# Altium PCB ROLL.PcbDoc (part 1 of 2)
Units mil, origin at the board's own origin, x right, y up, seen from the top; angles counter-clockwise.
Board outline 2043.78 x 1898.01 mil, 6 copper layers (Top Layer, Layer 1, Layer 2, Layer 3, Layer 4, Bottom Layer), stack 32.112 mil thick; 69 components, 72 nets, 326 pads, 408 vias.
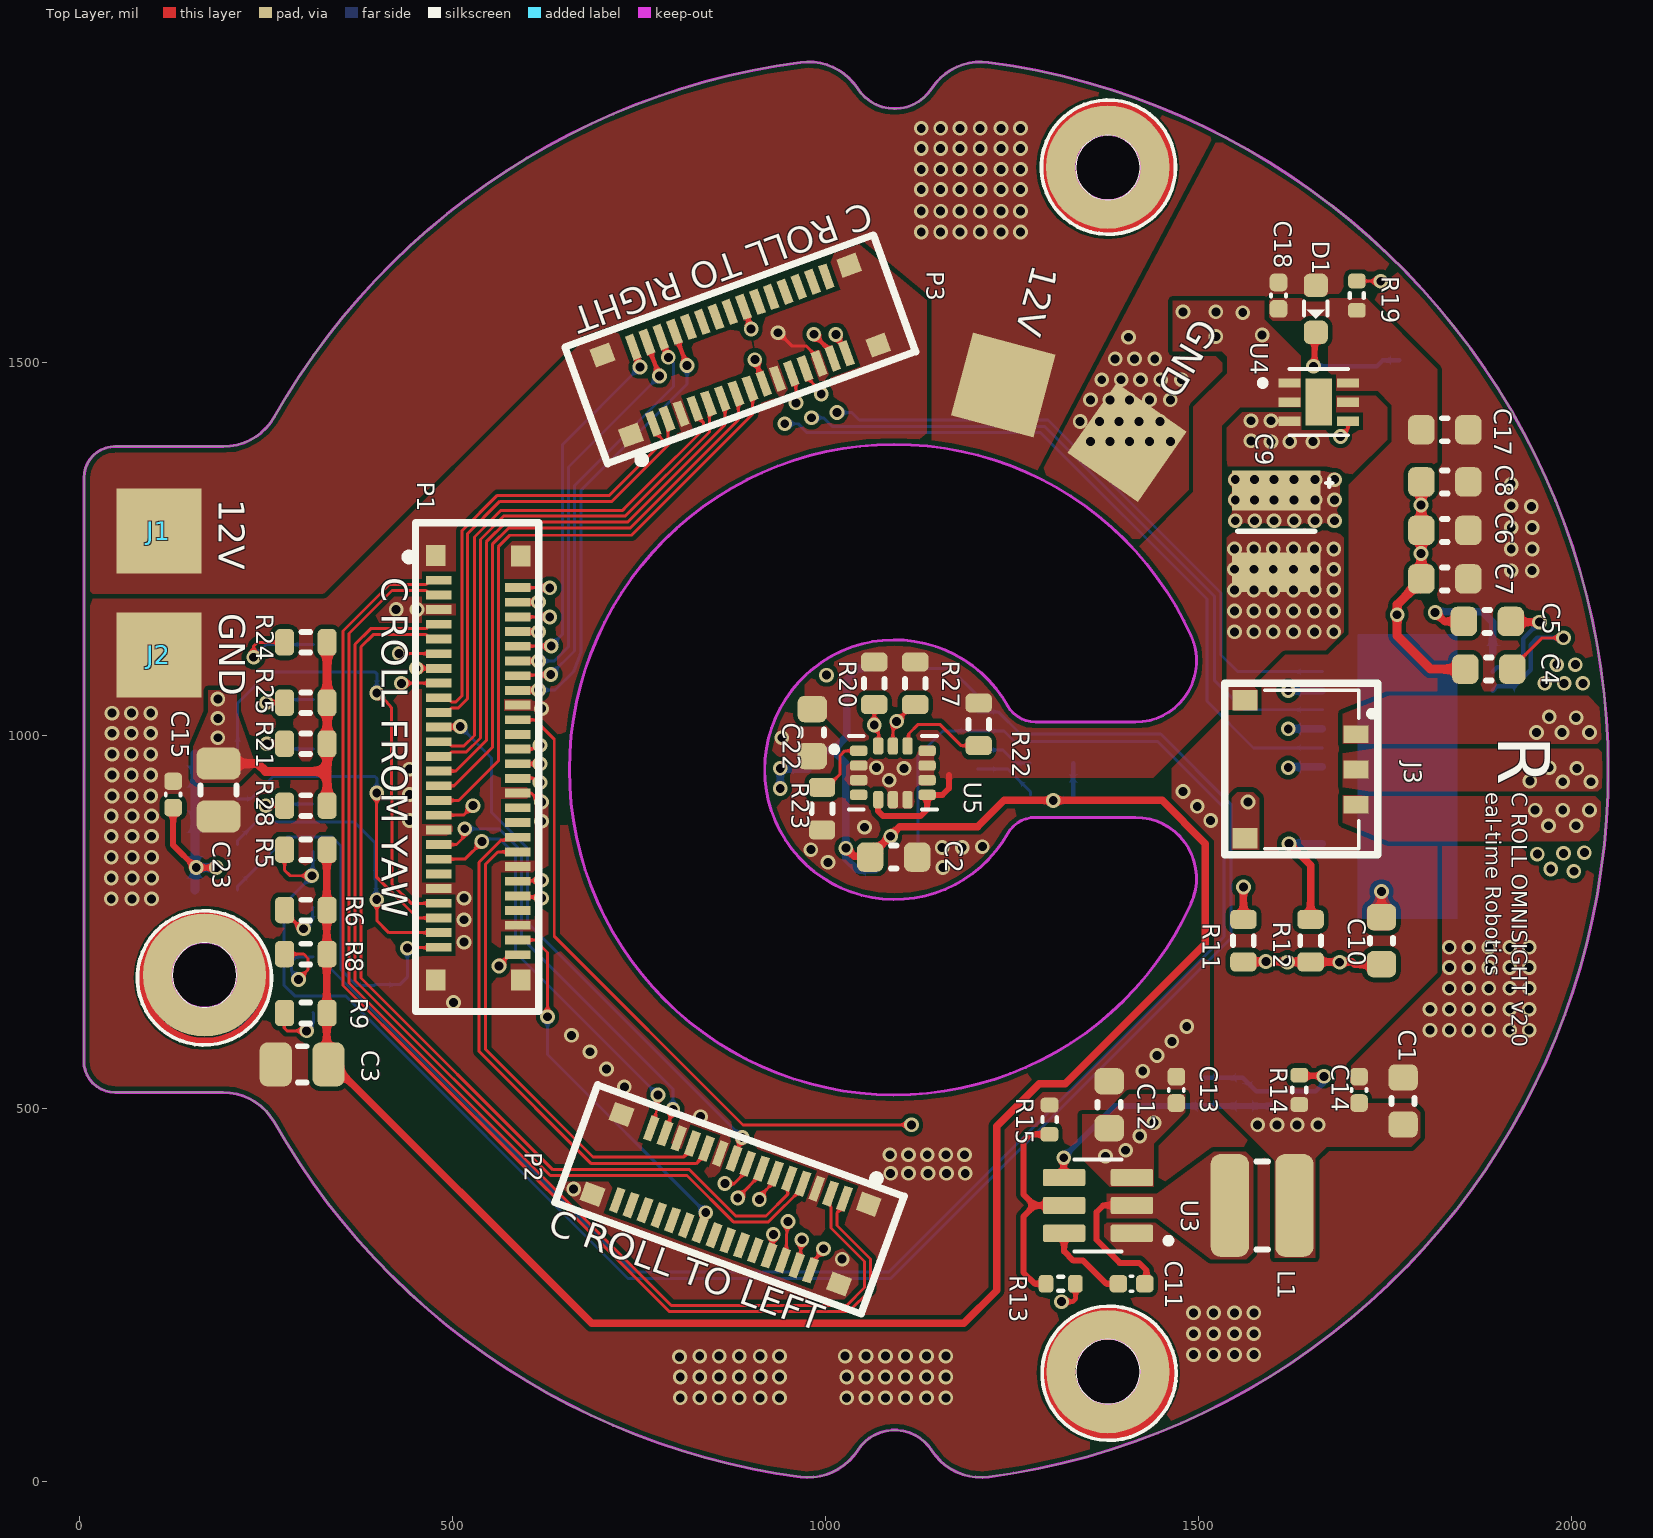
[diagram p0: Top Layer view]
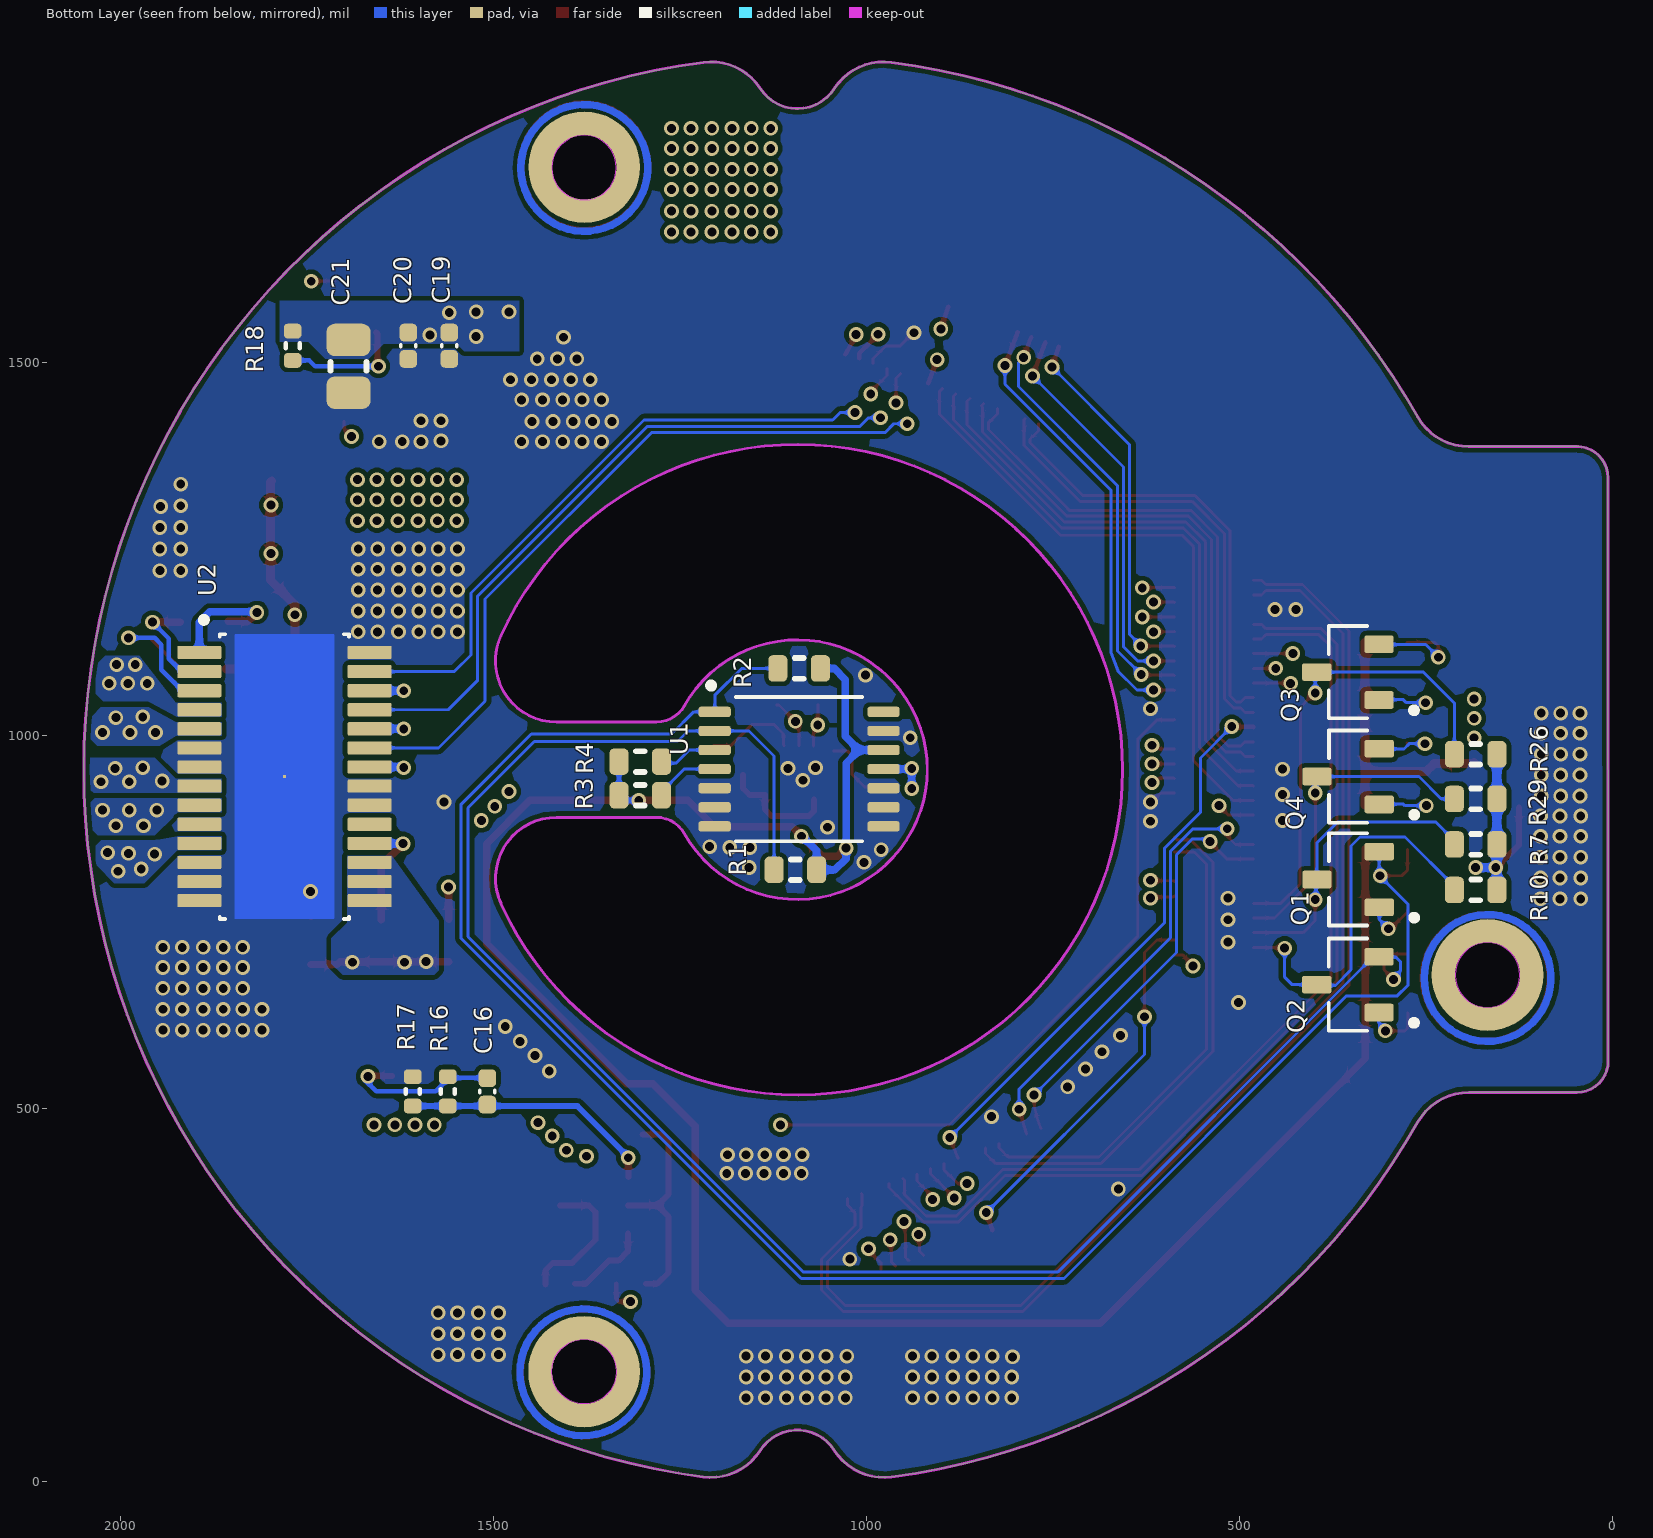
[diagram p1: Bottom Layer view, seen from below]
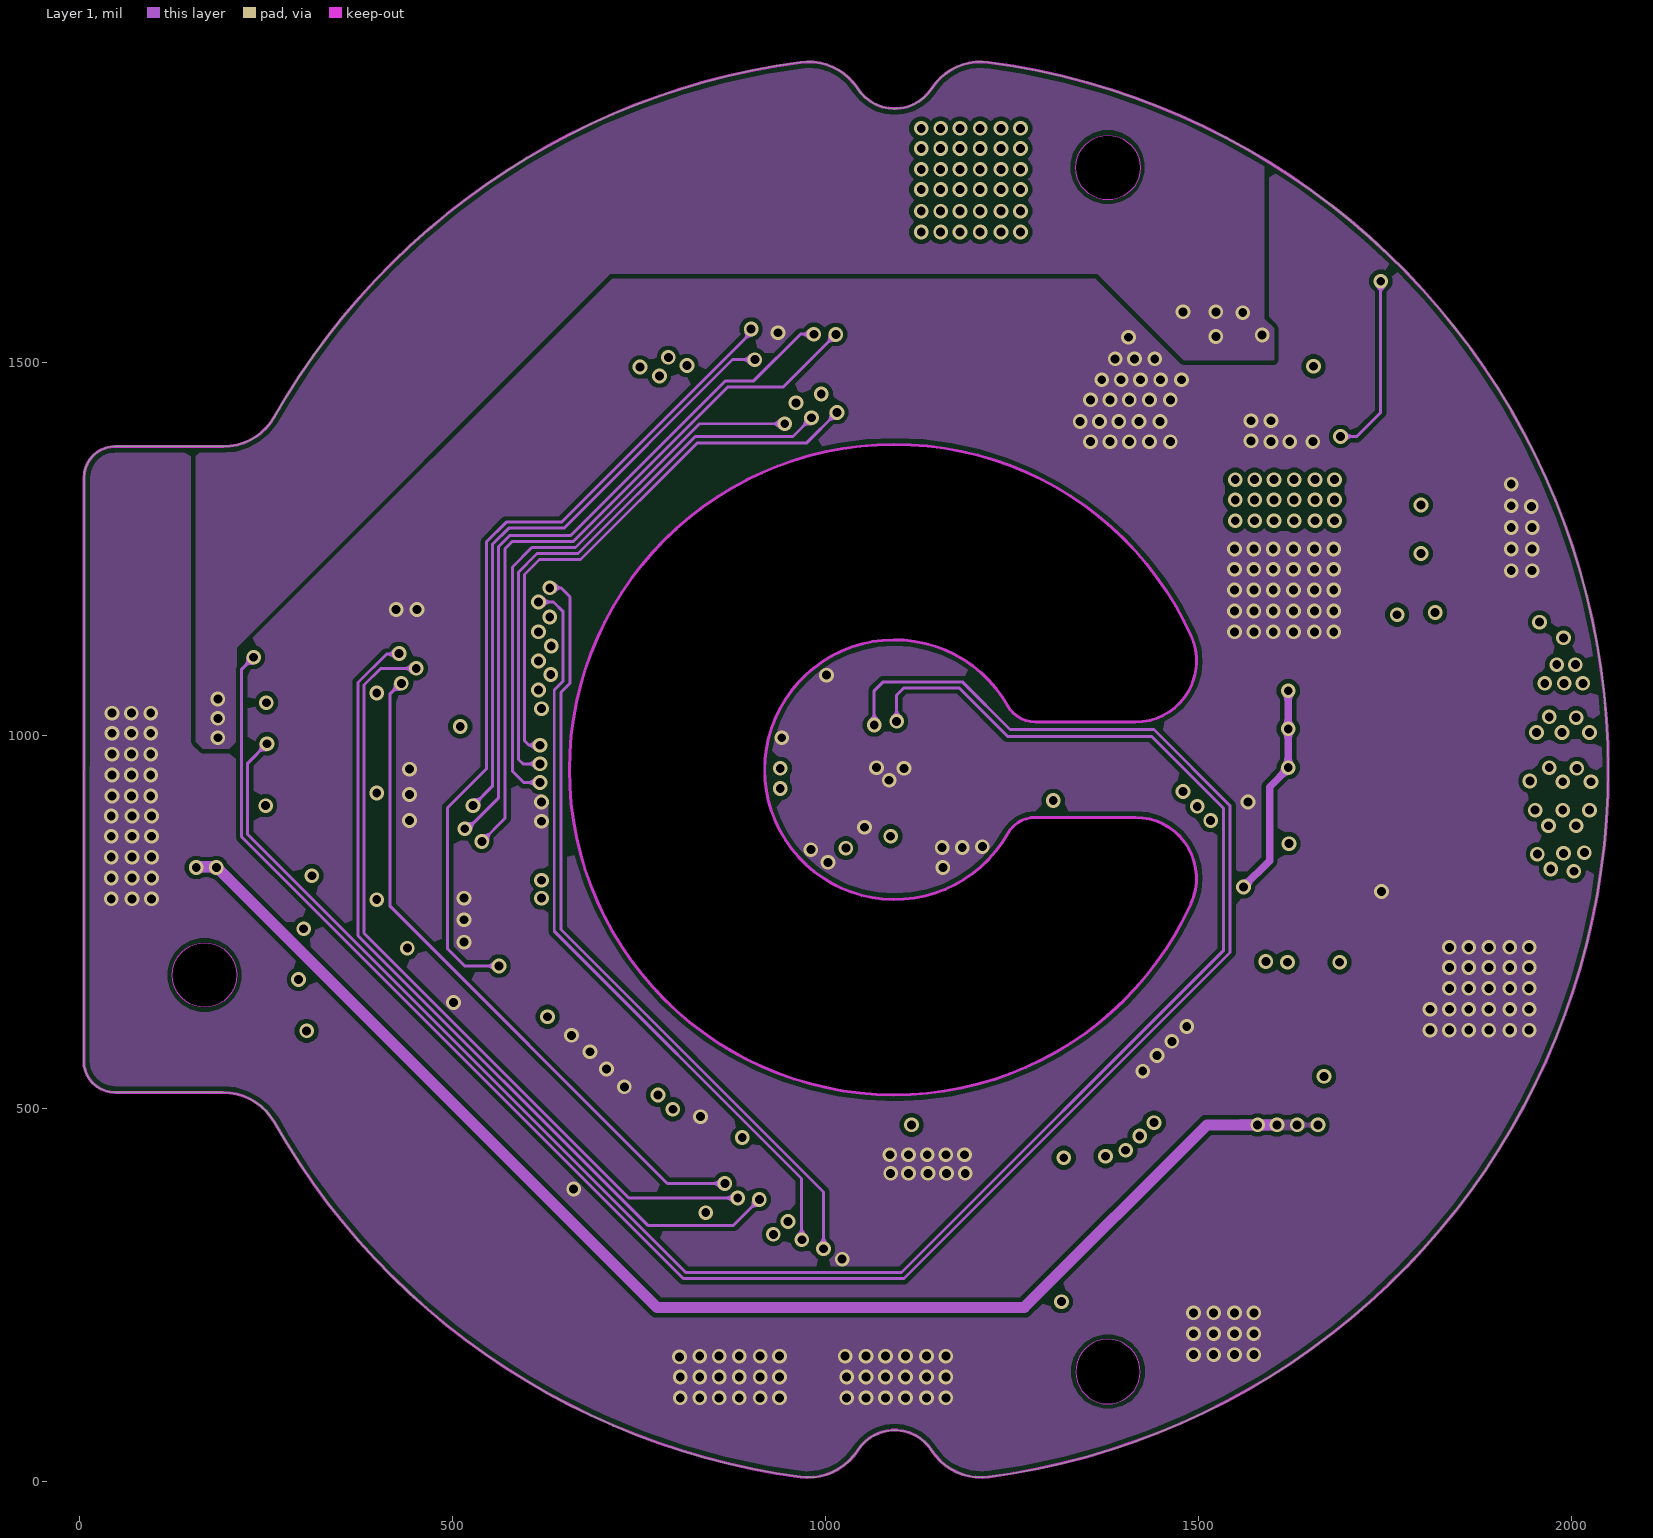
[diagram p2: Layer 1]
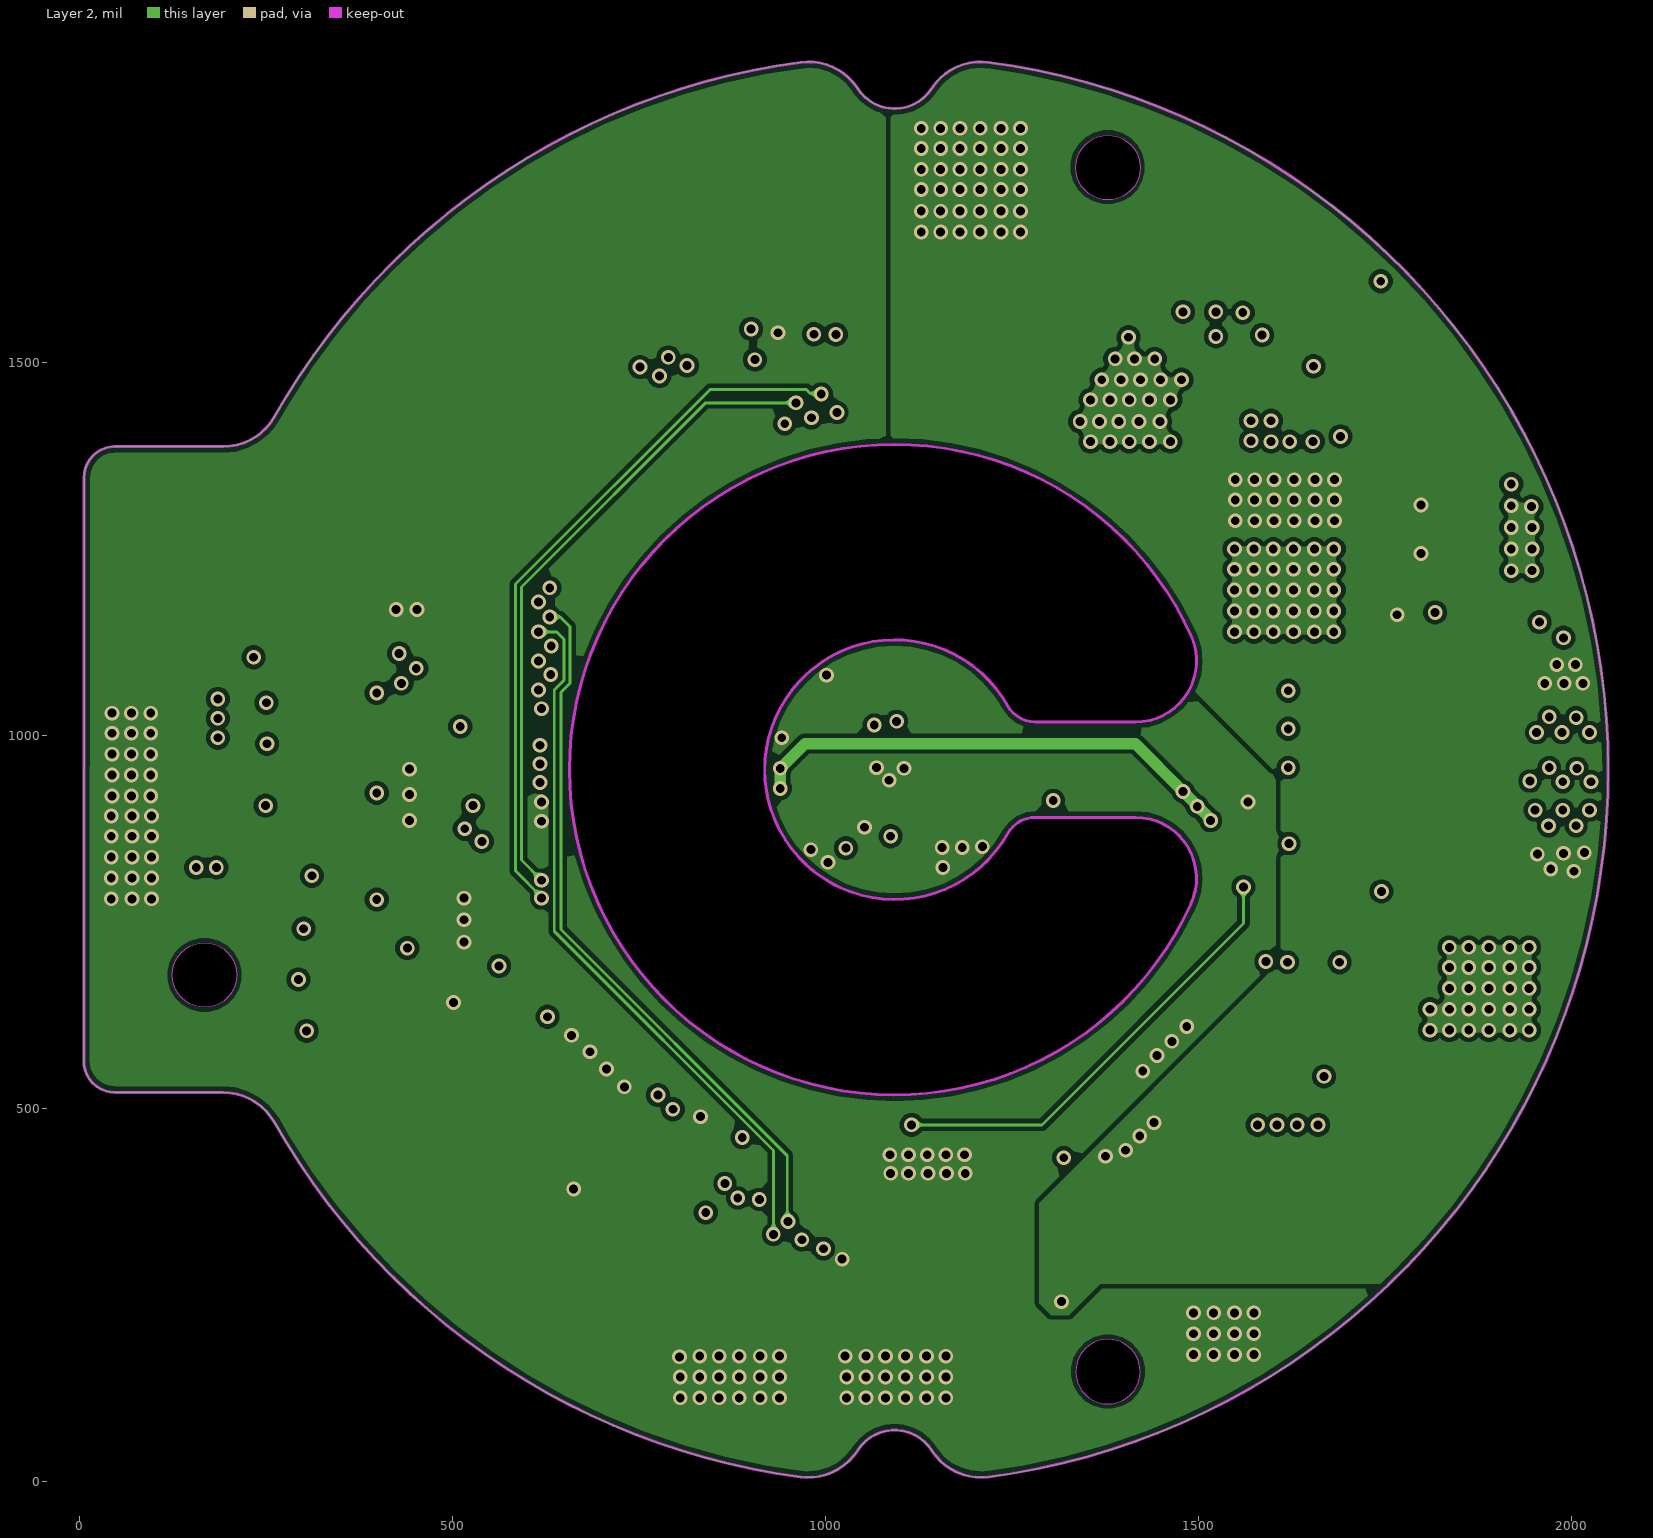
[diagram p3: Layer 2]
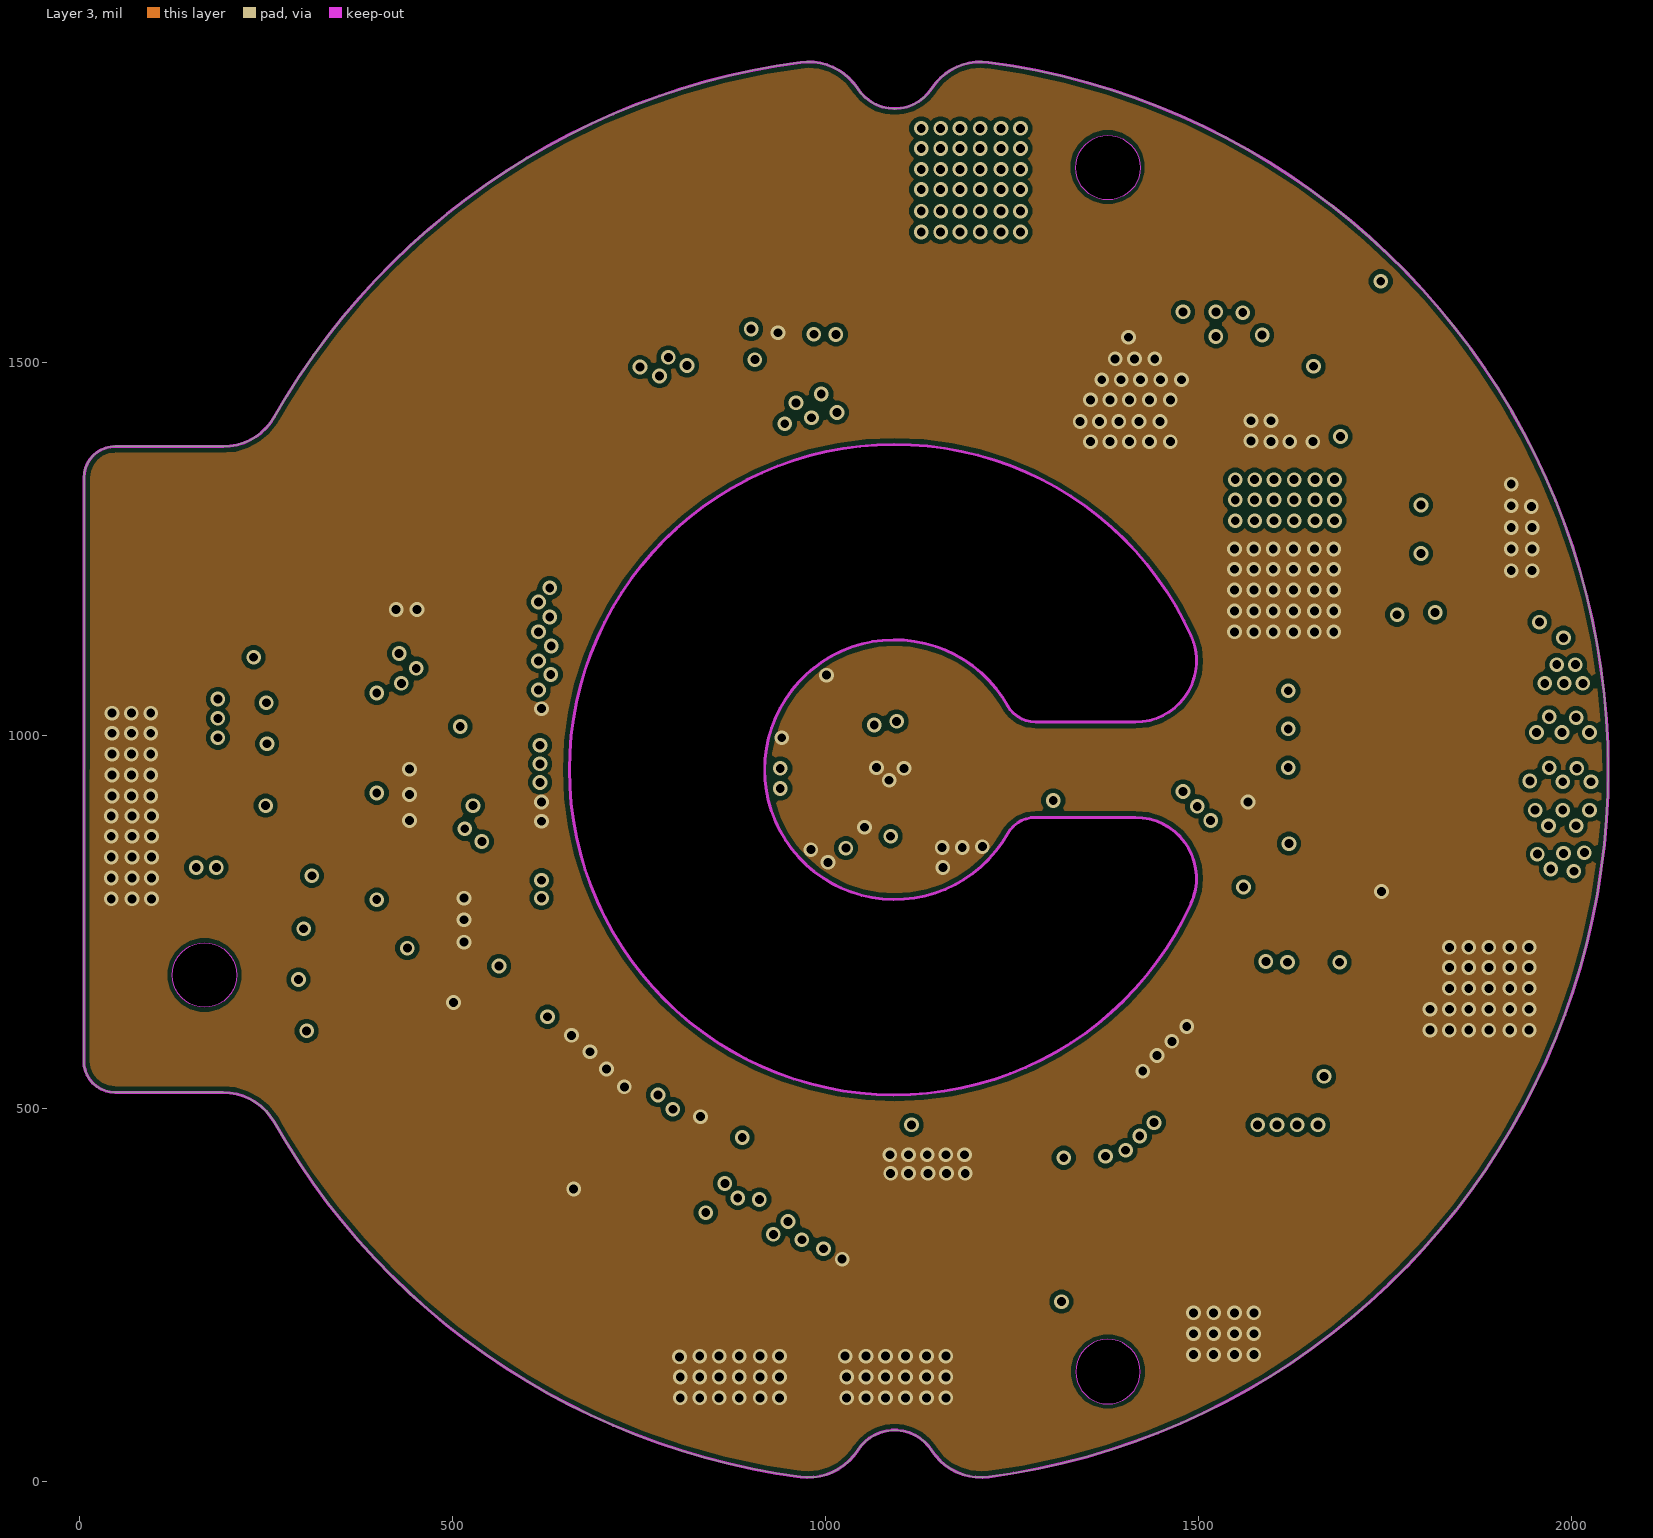
[diagram p4: Layer 3]
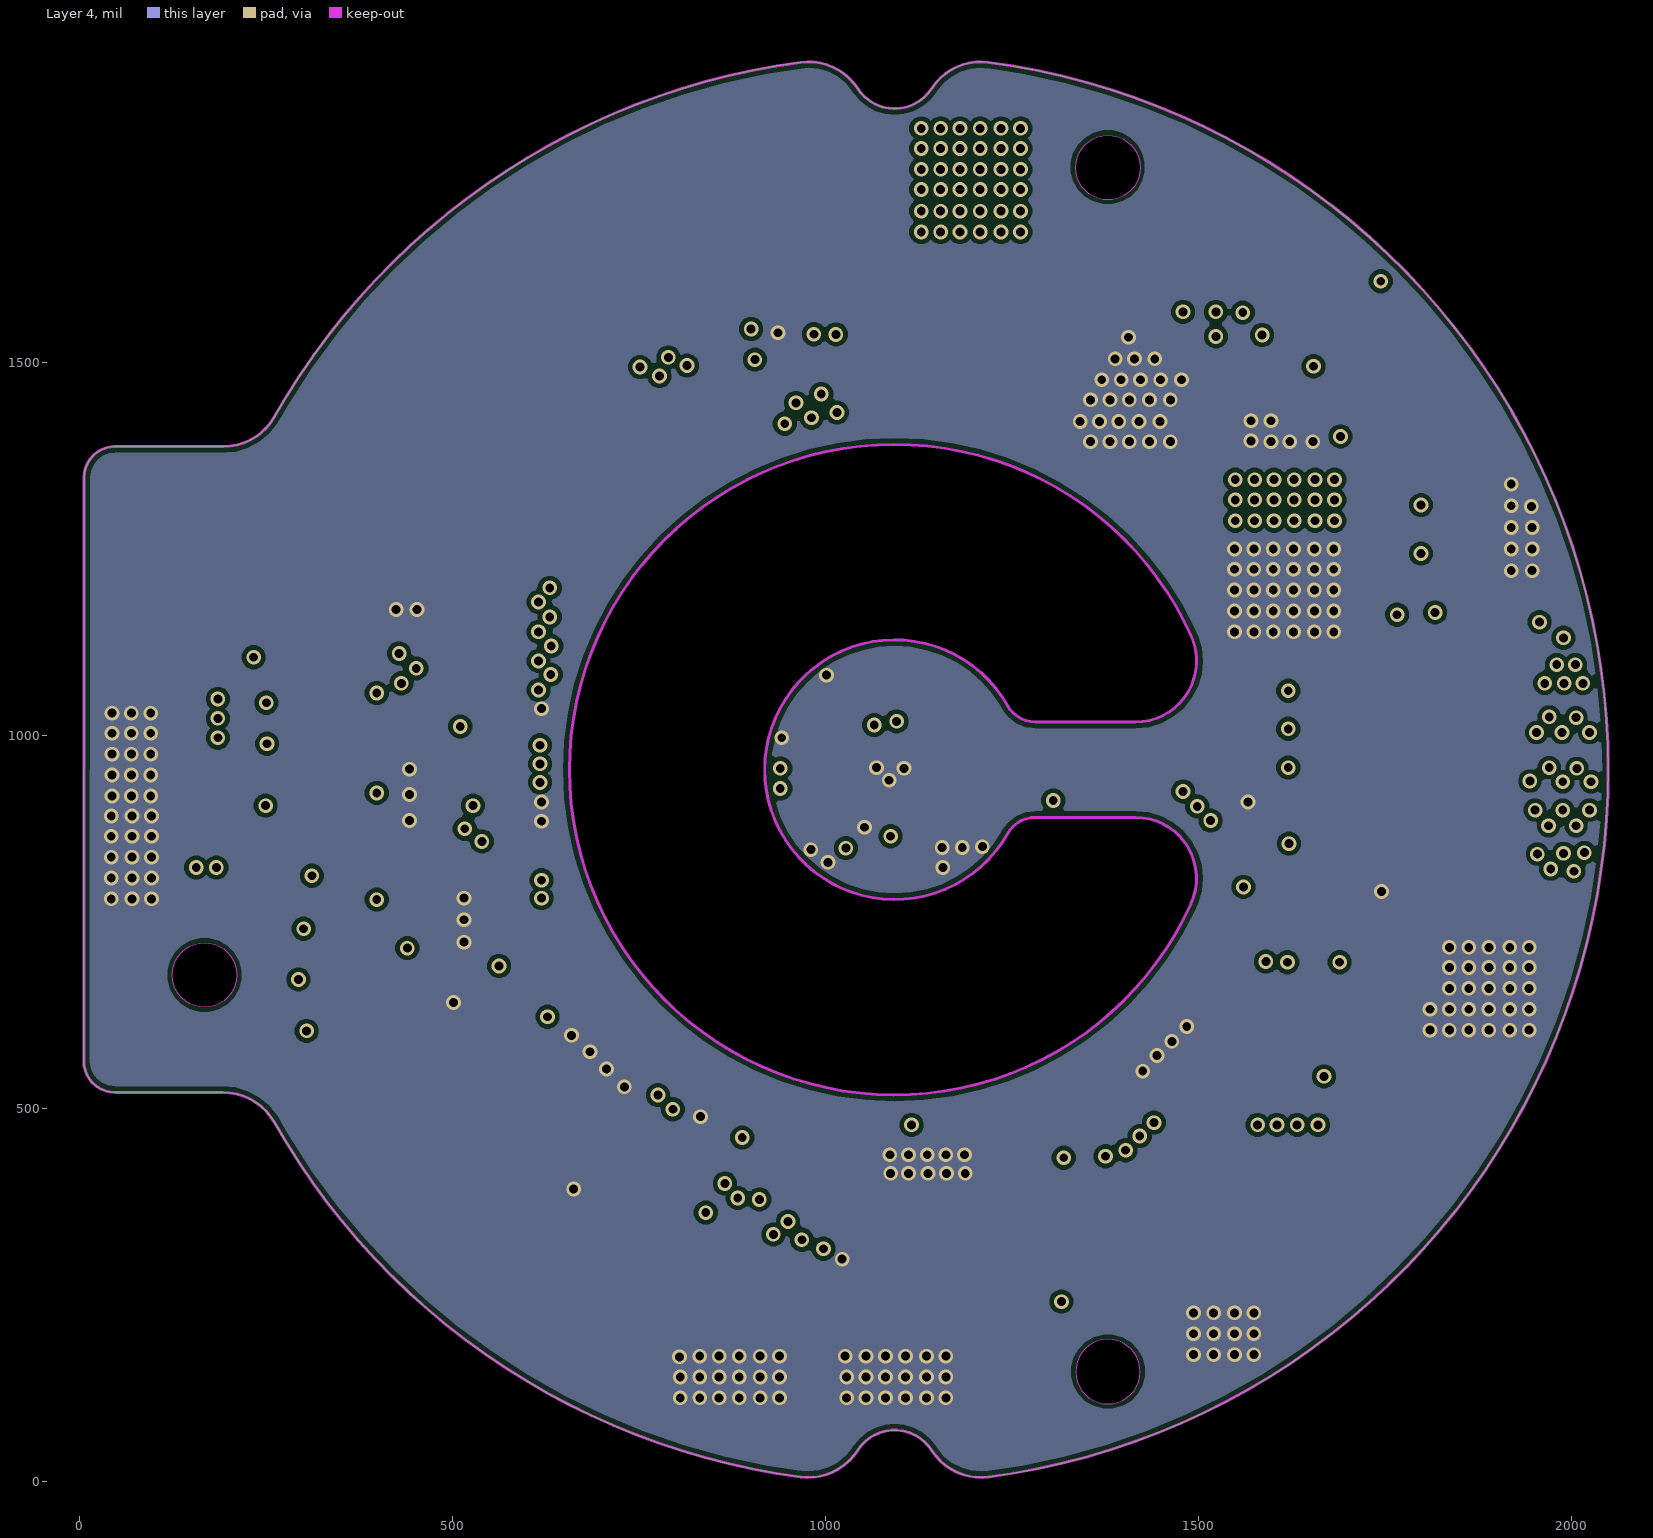
[diagram p5: Layer 4]
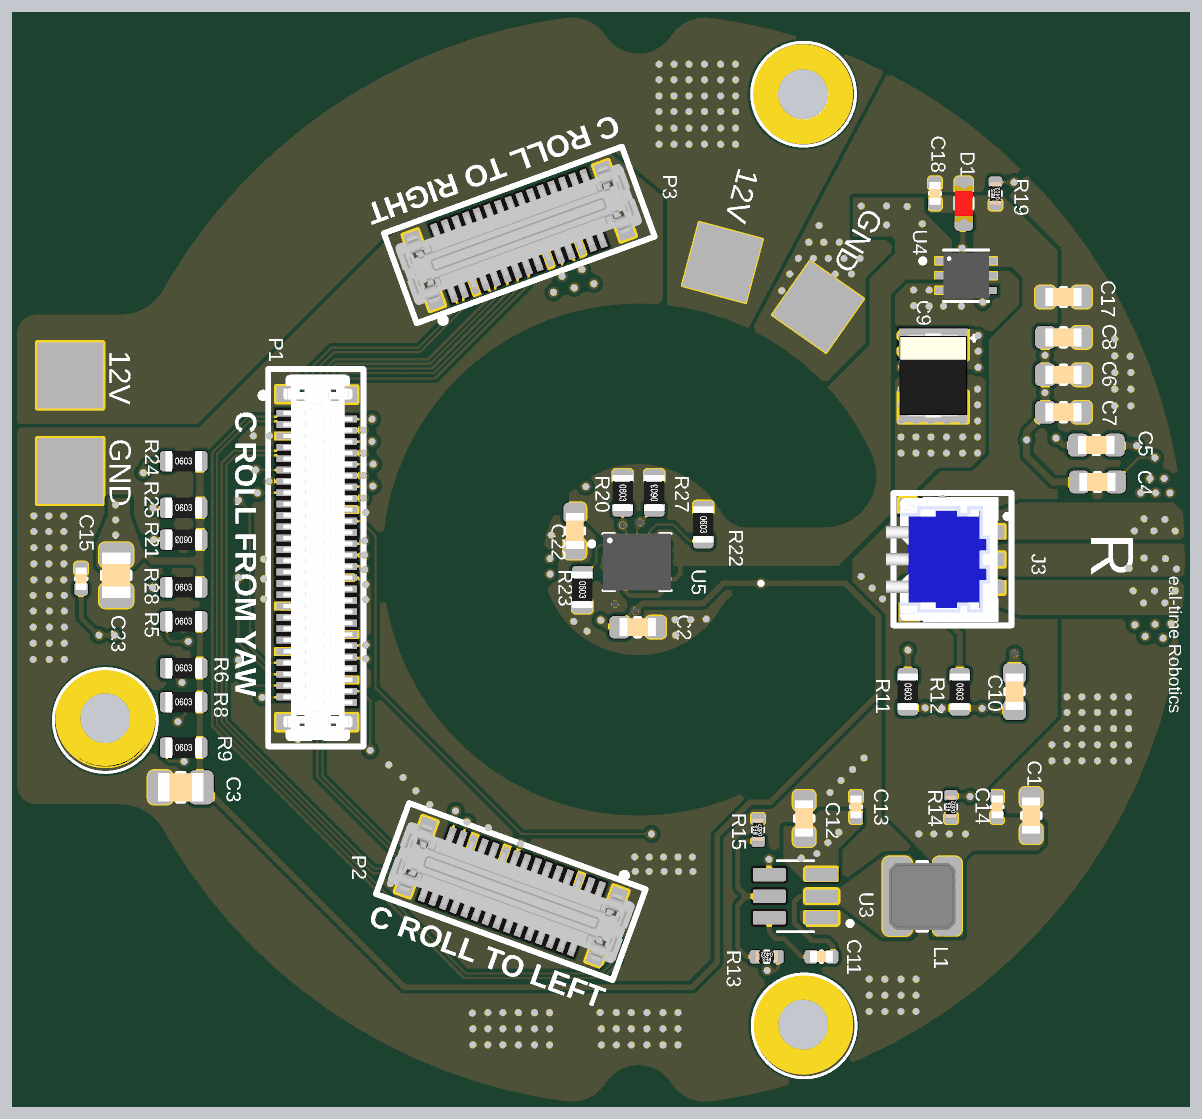
[diagram p7: 3D render of the assembled board from above, using the file's embedded part models]
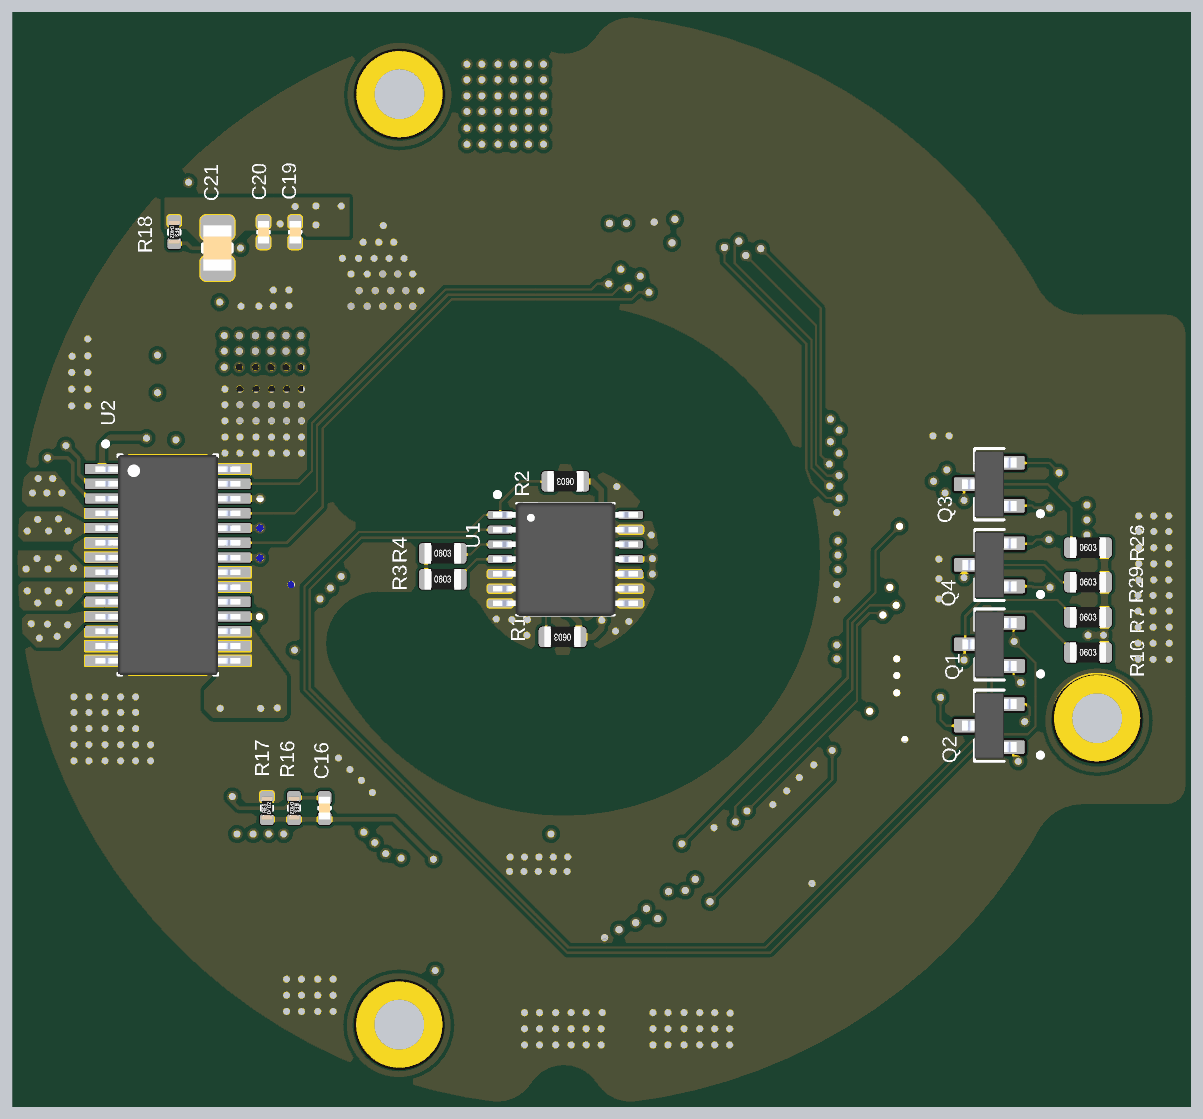
[diagram p8: 3D render of the assembled board from below, using the file's embedded part models]

## Layer stack, top to bottom
Top Solder: solder mask 0.4, Solder Resist, Dk 3.5
Top Layer: signal copper 1.4
Dielectric 2: prepreg 2.8, PP-006, Dk 4.1
Layer 1: signal copper 1.378
Dielectric 1: dielectric 12.6, FR-4, Dk 4.8
Layer 2: signal copper 1.378
Dielectric 3: prepreg 2.8, PP-006, Dk 4.1
Layer 3: signal copper 1.378
Dielectric 4: prepreg 2.8, PP-006, Dk 4.1
Layer 4: signal copper 1.378
Dielectric 5: prepreg 2.8, PP-006, Dk 4.1
Bottom Layer: signal copper 1.4
Bottom Solder: solder mask 0.4, Solder Resist, Dk 3.5

## Board outline
90.21,521.54 192.06,521.54 cw(c191.99,442.66) 260.53,481.69 ccw(c1092.43,954.33) 965.88,5.95 ccw(c976.3,84) 1042.61,41.54 cw(c1092.36,9.66) 1142.1,41.54 ccw(c1208.36,83.89) 1218.79,5.95 ccw(c1092.34,954.24) 1218.36,1902.6 ccw(c1208,1824.52) 1141.9,1867.36 cw(c1092.34,1899.43) 1042.77,1867.36 ccw(c976.72,1824.62) 966.31,1902.6 ccw(c1092.46,954.07) 260.8,1427.32 cw(c192.37,1466.25) 192.34,1387.52 47.57,1387.64 ccw(c47.5,1345.7) 5.56,1345.67 5.25,563.5 ccw(c47.19,563.51) 47.14,521.58
cut-out: 1335.02,147.16 ccw(c1378.33,147.16) 1378.33,103.85 ccw(c1378.33,147.16) 1421.63,147.16 ccw(c1378.33,147.16) 1378.33,190.46 ccw(c1378.33,147.16)
cut-out: 1378.33,1718.02 cw(c1378.33,1761.33) 1335.02,1761.33 cw(c1378.33,1761.33) 1378.33,1804.64 cw(c1378.33,1761.33) 1421.63,1761.33 cw(c1378.33,1761.33)
cut-out: 167.13,635.63 cw(c167.13,678.93) 123.82,678.93 cw(c167.13,678.93) 167.13,722.24 cw(c167.13,678.93) 210.44,678.93 cw(c167.13,678.93)
cut-out: 1244.03,868.7 cw(c1092.35,954.25) 1244.07,1039.72 ccw(c1280.99,1060.45) 1281.04,1018.11 1415.37,1018.11 ccw(c1415.34,1099.88) 1489.9,1133.47 ccw(c1092.35,954.24) 1489.86,774.92 ccw(c1415.31,808.51) 1415.33,890.28 1280.96,890.28 ccw(c1280.97,847.87)

## Design rules (kind name [scope] priority, off if disabled: settings)
Clearance [All] p1: gap=4 ignorepadtopadclearanceinfootprint=FALSE except(6: Arc-Poly Track-Poly SMDPad-Poly THPad-Poly Via-Poly Fill-Poly Poly-Poly)
DiffPairsRouting [All] p1: maxlimit=10 minlimit=4 mostfreqgap=4 toplayer_minwidth=3 toplayer_maxwidth=4 toplayer_prefwidth=4 midlayer1_minwidth=3 midlayer1_maxwidth=4 midlayer1_prefwidth=4 midlayer2_minwidth=3 midlayer2_maxwidth=4 midlayer2_prefwidth=4 midlayer3_minwidth=3 midlayer3_maxwidth=4 midlayer3_prefwidth=4 midlayer4_minwidth=3 midlayer4_maxwidth=4 midlayer4_prefwidth=4 bottomlayer_minwidth=3 bottomlayer_maxwidth=4 bottomlayer_prefwidth=4 maxuncoupledlength=500
HoleToHoleClearance [All] p1: gap=4 allowstackedmicrovias=TRUE
MinimumSolderMaskSliver [All] p1: minsoldermaskwidth=1
PlaneClearance [All] p1: clearance=5
PlaneConnect [All] p1: planeconnectstyle=Direct reliefexpansion=20 reliefentries=4 reliefconductorwidth=10 reliefairgap=10
PolygonConnect [All] p1: connectstyle=Direct reliefconductorwidth=10 reliefentries=4 polygonreliefangle="90 Angle" airgapwidth=10
RoutingVias [All] p1: holewidth=11.9 width=22 viastyle="Through Hole" minholewidth=6 minwidth=12 maxholewidth=60 maxwidth=100 useviatemplates=TRUE viatemplateguid#1={05EA8407-7C75-4242-AD4F-64C02B1635DD} viatemplateguid#2={89399E87-49A1-4D00-BFA4-EF0DE2985596} viatemplatename#1=v50h30m0mx0 viatemplatename#2=v50h30
SilkToSilkClearance [All] p1: silktosilkclearance=0
SilkToSolderMaskClearance [IsPad] p1: minsilkscreentomaskgap=0 clearancetoexposedcopper=TRUE
SolderMaskExpansion [All] p1: expansion=4 istentingtop=FALSE
UnRoutedNet [InNet('No Net')] p1:
Width [All] p1: maxlimit=100 minlimit=3 preferedwidth=4
22 further rules are at their usual default settings.

## Classes and differential pairs
component class PWR: C11 C12 C13 C14 C15 C16 C17 C18 C19 C20 C21 D1 J1 J2 L1 R13 R14 R15 R16 R17 R18 R19 U3 U4
component class IMU: C22 C23 Q3 Q4 R20 R21 R22 R23 R24 R25 R26 R27 R28 R29 U5
component class Encoder: C1 C2 C3 Q1 Q2 R1 R2 R3 R4 R5 R6 R7 R8 R9 R10 U1
component class Driver: C4 C5 C6 C7 C8 C9 C10 J3 R11 R12 U2
component class Connector: P1 P2 P3
differential pair ETHE2_TX: +ETHE2_TX_P -ETHE2_TX_N
differential pair ETHE2_RX: +ETHE2_RX_P -ETHE2_RX_N
differential pair ETHE1_TX: +ETHE1_TX_P -ETHE1_TX_N
differential pair ETHE1_RX: +ETHE1_RX_P -ETHE1_RX_N

## Components (designator, comment, footprint, x,y, rotation, side; value= is the part's Value field where it differs from the comment)
C1 "C0603C104M5RACTU" CAP0603 1774,510 r90 top
C2 "C0603C104M5RACTU" CAP0603 1091,837 r0 top
C3 "CL21A476MQYNNNE" CAP0805 298,559 r180 top
C4 "C0603C104M5RACTU" CAP0603 1889,1089 r0 top
C5 "C0603C103M5RACTU" CAP0603 1887,1153 r180 top
C6 "C0603C104M5RACTU" CAP0603 1830,1275 r0 top
C7 "C0603C104M5RACTU" CAP0603 1830,1210 r0 top
C8 "C0603C104M5RACTU" CAP0603 1830,1340 r0 top
C9 "T55B106M035C0200" T55B106M035C0200 1608,1275 r0 top
C10 "C0603C104M5RACTU" CAP0603 1745,725 r90 top
C11 "CC0402KRX5R9BB104" CAP0402 1410,265 r180 top
C12 "GRM188R6YA106MA73D" CAP0603 1380,505 r90 top
C13 "CC0402KRX5R9BB104" CAP0402 1470,525 r270 top
C14 "GRM158R61A226ME15D" CAP0402 1715,525 r270 top
C15 "GRM158R61A226ME15D" CAP0402 125,921 r270 top
C16 "75pF" CAP0402 1508,523 r270 bottom
C17 "GRM188R6YA106MA73D" CAP0603 1830,1410 r0 top
C18 "CC0402KRX5R9BB104" CAP0402 1607,1589.71 r270 top
C19 "CC0402KRX5R9BB104" CAP0402 1559,1522.56 r90 bottom
C20 "GRM158R61A226ME15D" CAP0402 1614,1522.56 r90 bottom
C21 "CL21A107MQYNNWE" CAP0805 1694,1495 r270 bottom
C22 "C0603C104M5RACTU" CAP0603 982,1004 r270 top
C23 "CL21A476MQYNNNE" CAP0805 186,927 r270 top
D1 "SML-310MTT86" "LED0603 RED" 1657,1572 r90 top
J1 "CON1" "ESC PAD 3X4" 106,1274 r0 top
J2 "CON1" "ESC PAD 3X4" 106,1108 r0 top
J3 "BM03B-ACHSS-GAN-TF" BM03B-ACHSS-GAN-TF 1635,955 r270 top
L1 "SRN3012BTA-100M" SRN3012BTA-100M 1585,370 r0 top
P1 "XSLS00-52-B" XSXL52 530,957 r270 top locked
P2 "XSLS00-30-A" XSXL30 911.4,393.36 r160 top locked
P3 "XSLS00-30-A" XSXL30 865,1480 r20 top locked
Q1 "BSS138" BSS138 354,807 r0 bottom
Q2 "BSS138" BSS138 354.27,666 r0 bottom
Q3 "BSS138" BSS138 354.27,1085 r0 bottom
Q4 "BSS138" BSS138 354,945 r0 bottom
R1 "RES0603" RES0603 1095,820 r0 bottom value=2.2K
R2 "RES0603" RES0603 1090,1090 r0 bottom value=2.2K
R3 "RES0603" RES0603 1303,920 r180 bottom value=4.7K
R4 "RES0603" RES0603 1303,965 r180 bottom value=4.7K
R5 "2.2k" RES0603 303,847 r0 top
R6 "RES0603" RES0603 303,766 r0 top value=0R
R7 "2.2k" RES0603 183,854 r180 bottom
R8 "2.2k" RES0603 303,707 r0 top
R9 "RES0603" RES0603 303,628 r0 top value=0R
R10 "2.2k" RES0603 183,793 r180 bottom
R11 "RC0603JR-074K7L" RES0603 1560,725 r270 top
R12 "RC0603JR-074K7L" RES0603 1650,725 r270 top
R13 "511K" RES0402 1315,265 r180 top
R14 "49.9R" RES0402 1635,525 r90 top
R15 "105K" RES0402 1300,485 r90 top
R16 "100K" RES0402 1561,523 r270 bottom
R17 "13.3K" RES0402 1608,523 r90 bottom
R18 "RT0402FRE07510RL" RES0402 1769,1522.56 r270 bottom
R19 "CRCW040210K0JNED" RES0402 1712,1589.71 r90 top
R20 "RC0603FR-072K2L" RES0603 1065,1070 r270 top
R21 "RC0603FR-072K2L" RES0603 303,989 r180 top
R22 "RC0603FR-071KL" RES0603 1205,1015 r270 top
R23 "RC0603JR-074K7L" RES0603 995,902 r270 top
R24 "2.2k" RES0603 303,1125 r0 top
R25 "MCR03EZPJ100" RES0603 303,1044 r0 top
R26 "2.2k" RES0603 183,975 r180 bottom
R27 "2.2k" RES0603 1120,1070 r90 top
R28 "MCR03EZPJ100" RES0603 303,906 r0 top
R29 "2.2k" RES0603 183,915 r180 bottom
U1 "AS5048B-HTSP-500" AS5048B-HTSP-500 1090,955 r180 bottom
U2 "DRV8313PWP" DRV8313PWP 1781.17,951.16 r180 bottom
U3 "TPS54302DDCR" "SOT95P280X110-6N - duplicate" 1365,370 r180 top
U4 "TLV76733DRVR" "SON65P200X200X80-7N - duplicate" 1661,1447 r0 top
U5 "ICM-42688-P" ICM-42688-P 1090,950 r0 top

## Footprints (in the part's own frame and the unit in brackets; to place one, negate y for a bottom-side part, rotate by r counter-clockwise, add the part's x,y. Pads: shape width x height; smd on the part's side, far side on the other; paste and mask are expansions set on the pad)
AS5048B-HTSP-500 [mm]
  rrect50% 1.1x0.35 smd mask+0.051: 1(-2.876,1.95) 2(-2.876,1.3) 3(-2.876,0.65) 4(-2.876,0) 5(-2.876,-0.65) 6(-2.876,-1.3) 7(-2.876,-1.95) 8(2.876,-1.95) 9(2.876,-1.3) 10(2.876,-0.65) 11(2.876,0) 12(2.876,0.65) 13(2.876,1.3) 14(2.876,1.95)
  silkscreen extent -3.07,-2.45 2.15,2.92, body extent -3.2,-2.5 3.2,2.5, height 1.2
BM03B-ACHSS-GAN-TF [mm]
  rect 0.6x0.85 smd: 1(-1.188,1.921) 2(0.012,1.921) 3(1.212,1.921)
  rect 0.7x0.85 smd: 4(2.362,-1.854) 5(-2.338,-1.854)
  silkscreen extent -2.69,-1.18 2.71,2.57, body extent -2.69,-2.88 2.71,2.05, height 1.45
BSS138 [mm]
  rrect25% 1x0.6 smd: 1(-1.06,0.95) 2(-1.06,-0.95) 3(1.06,0)
  silkscreen extent -2.35,-1.57 0.65,1.57, body extent -1.2,-1.45 1.2,1.45, height 1.11
CAP0402 [mm]
  rrect50% 0.6x0.6 smd mask+0.05: 1(0.45,0) 2(-0.45,0)
  silkscreen extent -0.04,-0.25 0.04,0.25, body extent -0.5,-0.25 0.5,0.25, height 0.55
CAP0603 [mm]
  rrect50% 0.9x1 smd mask+0.05: 1(-0.8,0) 2(0.8,0)
  silkscreen extent -0.1,-0.39 0.1,0.39, body extent -0.8,-0.4 0.8,0.4, height 0.8
CAP0805 [mm]
  rrect50% 1.1x1.5 smd mask+0.05: 1(-0.9,0) 2(0.9,0)
  silkscreen extent -0.15,-0.62 0.15,0.61, body extent -1,-0.62 1,0.63, height 0.9
DRV8313PWP [mm]
  rrect20% 1.5x0.45 smd mask+0: 1(-2.87,4.069) 2(-2.87,3.419) 3(-2.87,2.769) 4(-2.87,2.119) 5(-2.87,1.469) 6(-2.87,0.819) 7(-2.87,0.169) 8(-2.87,-0.481) 9(-2.87,-1.131) 10(-2.87,-1.781) 11(-2.87,-2.431) 12(-2.87,-3.081) 13(-2.87,-3.731) 14(-2.87,-4.381) 15(2.93,-4.381) 16(2.93,-3.731) 17(2.93,-3.081) 18(2.93,-2.431) 19(2.93,-1.781) 20(2.93,-1.131) 21(2.93,-0.481) 22(2.93,0.169) 23(2.93,0.819) 24(2.93,1.469) 25(2.93,2.119) 26(2.93,2.769) 27(2.93,3.419) 28(2.93,4.069)
  rect 0.1x0.1 smd paste-1 mask+0: 29(0.03,-0.156)
  Top Layer region: 1.688,4.693 1.69,4.693 1.693,4.692 1.695,4.692 1.698,4.691 1.7,4.69 1.703,4.689 1.705,4.687 1.707,4.686 1.709,4.684 1.711,4.683 1.713,4.681 1.715,4.679 1.717,4.677 1.719,4.675 1.72,4.673 1.722,4.671 1.723,4.669 1.725,4.667 1.726,4.664 1.727,4.662 1.728,4.659 1.728,4.657 1.729,4.654 1.729,4.652 1.73,4.649 1.73,4.647 1.73,4.644 1.73,-4.956 1.73,-4.959 1.73,-4.961 1.729,-4.964 1.729,-4.966 1.728,-4.969 1.728,-4.971 1.727,-4.974 1.726,-4.976 1.725,-4.979 1.723,-4.981 1.722,-4.983 1.72,-4.985 1.719,-4.987 1.717,-4.989 1.715,-4.991 1.713,-4.993 1.711,-4.995 1.709,-4.996 1.707,-4.998 1.705,-4.999 1.703,-5.001 1.7,-5.002 1.698,-5.003 1.695,-5.004 1.693,-5.004 1.69,-5.005 1.688,-5.005 1.685,-5.006 -1.625,-5.006 -1.628,-5.005 -1.63,-5.005 -1.633,-5.004 -1.635,-5.004 -1.638,-5.003 -1.64,-5.002 -1.643,-5.001 -1.645,-4.999 -1.647,-4.998 -1.649,-4.996 -1.651,-4.995 -1.653,-4.993 -1.655,-4.991 -1.657,-4.989 -1.659,-4.987 -1.66,-4.985 -1.662,-4.983 -1.663,-4.981 -1.665,-4.979 -1.666,-4.976 -1.667,-4.974 -1.668,-4.971 -1.668,-4.969 -1.669,-4.966 -1.669,-4.964 -1.67,-4.961 -1.67,-4.959 -1.67,-4.956 -1.67,4.644 -1.67,4.647 -1.67,4.649 -1.669,4.652 -1.669,4.654 -1.668,4.657 -1.668,4.659 -1.667,4.662 -1.666,4.664 -1.665,4.667 -1.663,4.669 -1.662,4.671 -1.66,4.673 -1.659,4.675 -1.657,4.677 -1.655,4.679 -1.653,4.681 -1.651,4.683 -1.649,4.684 -1.647,4.686 -1.645,4.687 -1.643,4.689 -1.64,4.69 -1.638,4.691 -1.635,4.692 -1.633,4.692 -1.63,4.693 -1.628,4.693 -1.625,4.694 1.685,4.694
  silkscreen extent -2.81,-5.01 2.23,5.28, body extent -3.17,-5.01 3.23,4.69, height 1.2
"ESC PAD 3X4" [mm]
  rect 2.9x2.9 smd: 1(0,0)
ICM-42688-P [mm]
  rrect50% 0.59x0.35 smd mask+0.04: 1(-1.165,0.75) 2(-1.165,0.25) 3(-1.165,-0.25) 4(-1.165,-0.75) 8(1.165,-0.75) 9(1.165,-0.25) 10(1.165,0.25) 11(1.165,0.75)
  rrect50% 0.35x0.59 smd mask+0.04: 5(-0.5,-0.915) 6(0,-0.915) 7(0.5,-0.915) 12(0.5,0.915) 13(0,0.915) 14(-0.5,0.915)
  silkscreen extent -2.1,-1.25 1.5,1.25, body extent -1.5,-1.25 1.5,1.25, height 0.97
"LED0603 RED" [mm]
  rrect50% 0.8x0.82 smd mask+0.05: 1(0.8,0) 2(-0.8,0)
  silkscreen extent -0.34,-0.4 0.26,0.4, body extent -0.8,-0.4 0.8,0.4, height 0.7
RES0402 [mm]
  rrect50% 0.5x0.6 smd mask+0.05: 1(-0.5,0) 2(0.5,0)
  silkscreen extent -0.08,-0.24 0.08,0.24, body extent -0.5,-0.25 0.5,0.25, height 0.35
RES0603 [mm]
  rrect50% 0.65x0.9 smd mask+0.05: 1(-0.725,0) 2(0.725,0)
  silkscreen extent -0.15,-0.35 0.15,0.35, body extent -0.8,-0.45 0.8,0.45, height 0.5
"SON65P200X200X80-7N - duplicate" [mm]
  rect 0.74x0.32 smd mask+0.05: 1(-0.995,0.65) 2(-0.995,0) 3(-0.995,-0.65) 4(0.995,-0.65) 5(0.995,0) 6(0.995,0.65)
  rect 0.9x1.6 smd paste-2 mask+0.05: 7(0,0)
  silkscreen extent -2.01,-1.13 1,1.13, body extent -1,-1 1,1, height 0.8
"SOT95P280X110-6N - duplicate" [mm]
  rrect25% 1.45x0.59 smd: 1(-1.155,0.95) 2(-1.155,0) 3(-1.155,-0.95) 4(1.155,-0.95) 5(1.155,0) 6(1.155,0.95)
  silkscreen extent -2.5,-1.57 0.8,1.57
SRN3012BTA-100M [mm]
  rrect50% 1.3x3.5 smd mask+0.051: 1(-1.1,0) 2(1.1,0)
  silkscreen extent -0.2,-1.5 0.2,1.5, body extent -1.48,-1.48 1.48,1.47, height 1.11
T55B106M035C0200 [mm]
  rect 3.02x1.35 smd: 1(-0.1,1.36) 2(-0.1,-1.42)
  silkscreen extent -1.4,-0.03 1.8,1.73, body extent -1.6,-1.88 1.4,1.82, height 2.1
XSXL30 [mm]
  rect 0.7x0.66 smd: 0(-3.677,-0.748) 0(-3.66,2.147) 0(5.279,2.147) 0(5.279,-0.746)
  rect 0.3x0.86 smd: 1(-2.835,-0.644) 2(-2.585,2.046) 3(-2.335,-0.644) 4(-2.085,2.046) 5(-1.835,-0.644) 6(-1.585,2.046) 7(-1.335,-0.644) 8(-1.085,2.046) 9(-0.835,-0.644) 10(-0.585,2.046) 11(-0.335,-0.644) 12(-0.085,2.046) 13(0.165,-0.644) 14(0.415,2.046) 15(0.665,-0.644) 16(0.915,2.046) 17(1.165,-0.644) 18(1.415,2.046) 19(1.665,-0.644) 20(1.915,2.046) 21(2.165,-0.644) 22(2.415,2.046) 23(2.665,-0.644) 24(2.915,2.046) 25(3.165,-0.644) 26(3.415,2.046) 27(3.665,-0.644) 28(3.915,2.046) 29(4.165,-0.644) 30(4.415,2.046)
  silkscreen extent -3.75,-1.79 -3.5,-1.54, body extent -4.53,-0.77 6.12,2.28, height 0.88
XSXL52 [mm]
  rect 0.7x0.66 smd: 0(-7.222,-1.346) 0(-7.205,1.549) 0(7.234,-1.344) 0(7.234,1.549)
  rect 0.3x0.86 smd: 1(-6.38,-1.242) 2(-6.13,1.448) 3(-5.88,-1.242) 4(-5.63,1.448) 5(-5.38,-1.242) 6(-5.13,1.448) 7(-4.88,-1.242) 8(-4.63,1.448) 9(-4.38,-1.242) 10(-4.13,1.448) 11(-3.88,-1.242) 12(-3.63,1.448) 13(-3.38,-1.242) 14(-3.13,1.448) 15(-2.88,-1.242) 16(-2.63,1.448) 17(-2.38,-1.242) 18(-2.13,1.448) 19(-1.88,-1.242) 20(-1.63,1.448) 21(-1.38,-1.242) 22(-1.13,1.448) 23(-0.88,-1.242) 24(-0.63,1.448) 25(-0.38,-1.242) 26(-0.13,1.448) 27(0.12,-1.242) 28(0.37,1.448) 29(0.62,-1.242) 30(0.87,1.448) 31(1.12,-1.242) 32(1.37,1.448) 33(1.62,-1.242) 34(1.87,1.448) 35(2.12,-1.242) 36(2.37,1.448) 37(2.62,-1.242) 38(2.87,1.448) 39(3.12,-1.242) 40(3.37,1.448) 41(3.621,-1.242) 42(3.871,1.448) 43(4.121,-1.242) 44(4.371,1.448) 45(4.621,-1.242) 46(4.871,1.448) 47(5.121,-1.242) 48(5.371,1.448) 49(5.621,-1.242) 50(5.871,1.448) 51(6.121,-1.242) 52(6.371,1.448)
  silkscreen extent -7.3,-2.39 -7.05,-2.14, body extent -8.08,-1.37 8.07,1.68, height 0.85

## Part data
C1 C2 C4 C6 C7 C8 C10 C22: library part CMP-00691-1, "CAP CER 0.1UF 50V X7R 0603", Capacitance=100nF, Case Code (Imperial)=0603, Case Code (Metric)=1608, Dielectric=X7R, Dielectric Material=Ceramic, Manufacturer 1=KEMET, Max Operating Temperature=125°C, Min Operating Temperature=-55°C, Package Quantity=1, Tolerance=20%, Voltage Rating=50V, Case/Package=0603, Contact Plating=Tin,Matte, Depth=0.8mm, Dissipation Factor=2.5%, Height=0.8mm, Lead Pitch=0.7mm, Length=1.6mm, Manufacturer Part Number 1=C0603C104M5RACTU, Mount="Surface Mount,PCB", Packaging="Tape and Reel", Radiation Hardening=No, REACH SVHC="No SVHC", Termination=SMD/SMT, Thickness=0.034inch, Voltage Rating (DC)=50V, Width=0.031inch
C3 C23: library part 885012107014, "CAP CER 47UF 6.3V X5R 0805", Capacitance=47uF, Case Code (Imperial)=0805, Case Code (Metric)=2012, Dielectric=X5R, Max Operating Temperature=85°C, Min Operating Temperature=-55°C, Tolerance=20%, Voltage Rating=6.3V, Case/Package=0805, Category="Ceramic Capacitors", ComponentLink1Description=http://www.farnell.com/datasheets/1958454.pdf?src-supplier=Farnell, ComponentLink1URL=http://www.farnell.com/datasheets/1958454.pdf?src-supplier=Farnell, ComponentLink2Description=http://www.farnell.com/datasheets/1958454.pdf?src-supplier=Element14, ComponentLink2URL=http://www.farnell.com/datasheets/1958454.pdf?src-supplier=Element14, ComponentLink3Description=https://katalog.we-online.de/pbs/datasheet/885012107014.pdf?src-supplier=Digi-Key, ComponentLink3URL=https://katalog.we-online.de/pbs/datasheet/885012107014.pdf?src-supplier=Digi-Key, ComponentLink4Description=http://www.farnell.com/datasheets/1958454.pdf?src-supplier=Newark, ComponentLink4URL=http://www.farnell.com/datasheets/1958454.pdf?src-supplier=Newark, Length=0.079inch, Manufacturer Part Number=CL21A476MQYNNNE, Mount="Surface Mount", Packaging="Cut Tape", Pricing 1="1=0.37000, 5=0.35200, 10=0.33000, 25=0.31900, 50=0.30900, 100=0.29800 (USD)", RoHS=Yes, RoHS Compliant=Yes, Series=WCAP-CSGP, Stock 1=3580, Supplier 1=Newark, Thickness=0.057inch, Voltage Rating (DC)=6.3V, Width=0.049inch
C5: library part CMP-00691-1, "CAP CER 10NF 50V X7R 0603", Capacitance=10nF, Case Code (Imperial)=0603, Case Code (Metric)=1608, Dielectric=X7R, Dielectric Material=Ceramic, Manufacturer 1=KEMET, Max Operating Temperature=125°C, Min Operating Temperature=-55°C, Package Quantity=1, Tolerance=20%, Voltage Rating=50V, Case/Package=0603, Contact Plating=Tin,Matte, Depth=0.8mm, Dissipation Factor=2.5%, Height=0.8mm, Lead Pitch=0.7mm, Length=1.6mm, Manufacturer Part Number 1=C0603C103M5RACTU, Mount="Surface Mount,PCB", Packaging="Tape and Reel", Radiation Hardening=No, REACH SVHC="No SVHC", Termination=SMD/SMT, Thickness=0.034inch, Voltage Rating (DC)=50V, Width=0.031inch
C9: "Capacitor", Manufacturer_Name=Vishay, Mouser Part Number=74-T55B106M035C0200, Arrow Part Number=T55B106M035C0200, Arrow Price/Stock=https://www.arrow.com/en/products/t55b106m035c0200/vishay, Datasheet Link=https://www.mouser.cn/datasheet/2/427/t55-537218.pdf, Height=2.1mm, Manufacturer_Part_Number=T55B106M035C0200, Mouser Price/Stock=https://www.mouser.co.uk/ProductDetail/Vishay-Polytech/T55B106M035C0200?qs=BZBei1rCqCCB8UyqeipbyQ%3D%3D
C11 C13 C18 C19: library part CMP-00265-1, "CAP CER 0.1UF 50V X5R 0402", Capacitance=100nF, Case/Package=0402, Dielectric=X5R, Manufacturer=Yageo, Max Operating Temperature=85°C, Min Operating Temperature=-55°C, Tolerance=10%, Voltage Rating=50V, Halogen Free="Halogen Free", Lead Free="Lead Free", Length=0.039inch, Manufacturer 1=Yageo, Manufacturer Part Number=CC0402KRX5R9BB104, Manufacturer Part Number 1=CC0402KRX5R9BB104, Mount="Surface Mount", Packaging="Tape and Reel", Thickness=0.022inch, Voltage Rating (DC)=50V, Width=0.02inch
C12 C17: library part CMP-01031-1, "CAP CER 10UF 35V X5R 0603", Capacitance=10uF, Case Code (Imperial)=0603, Case Code (Metric)=1608, Dielectric=X5R, Manufacturer 1="Murata Electronics", Max Operating Temperature=85°C, Min Operating Temperature=-55°C, Package Quantity=1, Tolerance=20%, Voltage=35V, Case/Package=0603, Composition=Ceramic, Depth=0.8mm, Height=0.8mm, Lead Free="Lead Free", Length=1.6mm, Manufacturer Part Number 1=GRM188R6YA106MA73D, Mount="Surface Mount", Number of Pins=2, Packaging="Tape and Reel", REACH SVHC="No SVHC", Termination=SMD/SMT, Thickness=0.031inch, Voltage Rating=35V, Voltage Rating (DC)=35V, Weight=0.000222oz, Width=0.031inch
C14 C15 C20: library part CMP-00520-1, "CAP CER 22UF 10V X5R 0402", Capacitance=22uF, Case Code (Imperial)=0402, Case Code (Metric)=1005, Dielectric=X5R, Manufacturer 1="TDK Corporation", Max Operating Temperature=85°C, Min Operating Temperature=-55°C, Tolerance=10%, Voltage=10V, Case/Package=0402, Depth=0.5mm, Length=1mm, Manufacturer Part Number 1=GRM158R61A226ME15D, Packaging="Tape and Reel", Radiation Hardening=No, REACH SVHC="No SVHC", Termination=SMD/SMT, Voltage Rating=10V
C16: library part CAP_Dup1_16, "CAP CER 75PF 25V C0G/NP0 0402", Dielectric Type=Capacitors, Manufacturer=YAGEO, Manufacturer PN=CC0402JRNPO9BN750, Package Size="0402 (1005 Metric)", Rated Voltage=25V, Temperature Coefficient="C0G, NP0", Tolerance=5%, CLASS=DISCRETE, PART_NUMBER=TMP-416
C21: library part CMP-00446-1, "CAP CER 100UF 6.3V X5R 0805", Capacitance=100uF, Case Code (Imperial)=0805, Case Code (Metric)=2012, Dielectric=X5R, Dielectric Material=Ceramic, Manufacturer 1="TDK Corporation", Max Operating Temperature=85°C, Min Operating Temperature=-55°C, Package Quantity=2000, Tolerance=20%, Voltage Rating=6.3V, Case/Package=0805, Composition=Ceramic, Depth=1.25mm, Height=1.25mm, Lead Free="Lead Free", Length=2mm, Manufacturer Part Number 1=CL21A107MQYNNWE, Mount="Surface Mount", Packaging="Tape and Reel", REACH SVHC="No SVHC", Termination=SMD/SMT, Thickness=0.057inch, Voltage Rating (DC)=6.3V, Weight=0.000194oz, Width=0.049inch
D1: library part CMP-01130-2, "LED GREEN CLEAR 0603 SMD", Case Code (Imperial)=0603, Case Code (Metric)=1608, Color=Green,Yellow, Forward Current=20mA, Forward Voltage=2.2V, Illumination Color=Green, Lens Color=Colorless,Clear, Manufacturer 1="Rohm Semiconductor", Max Operating Temperature=85°C, Min Operating Temperature=-30°C, Package Quantity=3000, Case/Package=0603, Dominant Wavelength=570nm, Height=0.9mm, Lead Free="Lead Free", Length=1.6mm, Lens Style=Rectangular,Clear,Diffused,Colorless, Lens Transparency=Clear, Luminous Intensity=16mcd, Manufacturer Part Number 1=SML-310MTT86, Mount="Surface Mount", Number of LEDs=1, Number of Pins=2, Packaging="Tape and Reel", Radiation Hardening=No, Test Current=20mA, Viewing Angle=140°, Wavelength=570nm, Width=0.8mm
J1 J2: "SOLDER PADS"
J3: "ACH Series 3 Position 1.2 mm Pitch Disconnectable Crimp Style Housing", Package=None, Availability=Unavailable, MP=BM03B-ACHSS-GAN-TF, Price=None
L1: library part SRN3012BTA-330M, "10uH", Manufacturer_Name=Bourns, Datasheet Link=https://www.bourns.com/docs/Product-Datasheets/SRN3012BTA.pdf, Geometry.Height=1.2mm, Manufacturer_Part_Number=SRN3012BTA-100M, Mouser Part Number=SRN3012BTA-100M, Mouser Price/Stock=https://www.mouser.co.uk/ProductDetail/Bourns/SRN3012BTA-330M?qs=Imq1NPwxi74rPoSZ4PPaRw%3D%3D
Q1 Q2: "N-Channel 50 V 220mA (Ta) 350mW (Ta) Surface Mount SOT-23-3", Current - Continuous Drain (Id) @ 25°C=220mA, Drain to Source Voltage (Vdss)="50 V", Input Capacitance (Ciss) (Max) @ Vds="50 pF @ 25 V", Operating Temperature="150°C (TJ)", Power Dissipation (Max)="225mW (Ta)", Supplier Device Package=SOT-23, (Max Rds On, Min Rds On="4.5V, 10V", FET Type=N-Channel, MP=BSS138, Rds On (Max) @ Id, Vgs="3.5Ohm @ 220mA, 10V", Vgs (Max)=±20V, Vgs(th) (Max) @ Id="1.6V @ 1mA"
Q3 Q4: "N-Channel 50 V 220mA (Ta) 350mW (Ta) Surface Mount SOT-23-3", Package="SOT-23-3 Motorola", Check_prices=https://www.snapeda.com/parts/BSS138/Onsemi/view-part/?ref=eda, MF=onsemi, MP=BSS138, SnapEDA_Link=https://www.snapeda.com/parts/BSS138/Onsemi/view-part/?ref=snap
R1 R2 R3 R4 R6 R9: "RES 0805", MP="add later"
R5 R7 R8 R10 R24 R26 R27 R29: library part RC0603FR-072K2L, "Res Thick Film 0603 2.2K Ohm 1% 0.1W(1/10W) +/-100ppm/C Epoxy Pad SMD T/R", Case Code (Imperial)=0603, Manufacturer="Yageo Group", Max Operating Temperature=155°C, Max Power Dissipation=100mW, Min Operating Temperature=-55°C, Resistance=2.2kΩ, Temperature Coefficient=100ppm/°C, Tolerance=1%, Voltage Rating=75V, Voltage Rating (DC)=50V, Case Code (Metric)=0603, Case/Package=0603, Category="Chip SMD Resistors", China RoHS=Non-Compliant, ComponentLink1Description=https://datasheet.octopart.com:443/RC0603FR-072K2L-Yageo-datasheet-175887523.pdf?src-supplier=IHS, ComponentLink1URL=https://datasheet.octopart.com:443/RC0603FR-072K2L-Yageo-datasheet-175887523.pdf?src-supplier=IHS, ComponentLink2Description=https://datasheet.octopart.com:443/RC0603FR-072K2L-Yageo-datasheet-103092701.pdf?src-supplier=Upverter, ComponentLink2URL=https://datasheet.octopart.com:443/RC0603FR-072K2L-Yageo-datasheet-103092701.pdf?src-supplier=Upverter, ComponentLink3Description=https://datasheet.octopart.com:443/RC0603FR-072K2L-Yageo-datasheet-8328172.pdf?src-supplier=Newark, ComponentLink3URL=https://datasheet.octopart.com:443/RC0603FR-072K2L-Yageo-datasheet-8328172.pdf?src-supplier=Newark, ComponentLink4Description=https://datasheet.octopart.com:443/RC0603FR-072K2L-Yageo-datasheet-12596169.pdf?src-supplier=Newark, ComponentLink4URL=https://datasheet.octopart.com:443/RC0603FR-072K2L-Yageo-datasheet-12596169.pdf?src-supplier=Newark, ComponentLink5Description=https://datasheet.octopart.com:443/RC0603FR-072K2L-Yageo-datasheet-13691069.pdf?src-supplier=Newark, ComponentLink5URL=https://datasheet.octopart.com:443/RC0603FR-072K2L-Yageo-datasheet-13691069.pdf?src-supplier=Newark, ComponentLink6Description=https://datasheet.octopart.com:443/RC0603FR-072K2L-Yageo-datasheet-34211833.pdf?src-supplier=element14+APAC, ComponentLink6URL=https://datasheet.octopart.com:443/RC0603FR-072K2L-Yageo-datasheet-34211833.pdf?src-supplier=element14+APAC, ComponentLink7Description=https://datasheet.octopart.com:443/RC0603FR-072K2L-Yageo-datasheet-62067350.pdf?src-supplier=element14+APAC, ComponentLink7URL=https://datasheet.octopart.com:443/RC0603FR-072K2L-Yageo-datasheet-62067350.pdf?src-supplier=element14+APAC, ComponentLink8Description=https://datasheet.octopart.com:443/RC0603FR-072K2L-Yageo-datasheet-17842380.pdf?src-supplier=element14+APAC, ComponentLink8URL=https://datasheet.octopart.com:443/RC0603FR-072K2L-Yageo-datasheet-17842380.pdf?src-supplier=element14+APAC, ComponentLink9Description=https://datasheet.octopart.com:443/RC0603FR-072K2L-Yageo-datasheet-21426514.pdf?src-supplier=element14+APAC, ComponentLink9URL=https://datasheet.octopart.com:443/RC0603FR-072K2L-Yageo-datasheet-21426514.pdf?src-supplier=element14+APAC, ComponentLink10Description=https://datasheet.octopart.com:443/RC0603FR-072K2L-Yageo-datasheet-164759695.pdf?src-supplier=Future+Electronics, ComponentLink10URL=https://datasheet.octopart.com:443/RC0603FR-072K2L-Yageo-datasheet-164759695.pdf?src-supplier=Future+Electronics, ComponentLink11Description=https://datasheet.octopart.com:443/RC0603FR-072K2L-Yageo-datasheet-137700087.pdf?src-supplier=Future+Electronics, ComponentLink11URL=https://datasheet.octopart.com:443/RC0603FR-072K2L-Yageo-datasheet-137700087.pdf?src-supplier=Future+Electronics, ComponentLink12Description=https://datasheet.octopart.com:443/RC0603FR-072K2L-Yageo-datasheet-27584510.pdf?src-supplier=Future+Electronics, ComponentLink12URL=https://datasheet.octopart.com:443/RC0603FR-072K2L-Yageo-datasheet-27584510.pdf?src-supplier=Future+Electronics, ComponentLink13Description=https://datasheet.octopart.com:443/RC0603FR-072K2L-Yageo-datasheet-15599030.pdf?src-supplier=Future+Electronics, ComponentLink13URL=https://datasheet.octopart.com:443/RC0603FR-072K2L-Yageo-datasheet-15599030.pdf?src-supplier=Future+Electronics, ComponentLink14Description=https://datasheet.octopart.com:443/RC0603FR-072K2L-Yageo-datasheet-8324193.pdf?src-supplier=Future+Electronics, ComponentLink14URL=https://datasheet.octopart.com:443/RC0603FR-072K2L-Yageo-datasheet-8324193.pdf?src-supplier=Future+Electronics, ComponentLink15Description=https://datasheet.octopart.com:443/RC0603FR-072K2L-Yageo-datasheet-79472498.pdf?src-supplier=Megastar, ComponentLink15URL=https://datasheet.octopart.com:443/RC0603FR-072K2L-Yageo-datasheet-79472498.pdf?src-supplier=Megastar, ComponentLink16Description=https://datasheet.octopart.com/RC0603FR-072K2L-Yageo-datasheet-73766026.pdf, ComponentLink16URL=https://datasheet.octopart.com/RC0603FR-072K2L-Yageo-datasheet-73766026.pdf, ComponentLink17Description=https://datasheet.octopart.com:443/RC0603FR-072K2L-Yageo-datasheet-118562.pdf?src-supplier=DigiKey, ComponentLink17URL=https://datasheet.octopart.com:443/RC0603FR-072K2L-Yageo-datasheet-118562.pdf?src-supplier=DigiKey, ComponentLink18Description=https://datasheet.octopart.com:443/RC0603FR-072K2L-Yageo-datasheet-499455.pdf?src-supplier=element14, ComponentLink18URL=https://datasheet.octopart.com:443/RC0603FR-072K2L-Yageo-datasheet-499455.pdf?src-supplier=element14, ComponentLink19Description=http://sigma.octopart.com:80/rohs_statement/Yageo-company-2.pdf?src-supplier=Compliance+Statements, ComponentLink19URL=http://sigma.octopart.com:80/rohs_statement/Yageo-company-2.pdf?src-supplier=Compliance+Statements, ComponentLink20Description=http://sigma.octopart.com:80/conflict_mineral_statement/Yageo-company-3.pdf?src-supplier=Compliance+Statements, ComponentLink20URL=http://sigma.octopart.com:80/conflict_mineral_statement/Yageo-company-3.pdf?src-supplier=Compliance+Statements, Composition="Thick Film", Depth=800µm, Features="Moisture Resistant", Height=450µm, Lead Free="Lead Free", Length=1.6mm, Lifecycle Status=Production, Manufacturer Part Number=RC0603FR-072K2L, Military Standard=Not, Mount="Surface Mount", Number of Pins=2, Number of Terminals=2, Number of Terminations=2, Packaging="Tape & Reel", Power Dissipation=100mW, Power Rating=100mW, Pricing 1="5000=0.00146, 10000=0.00141, 20000=0.00136, 30000=0.00131, 40000=0.00127 (USD)", REACH SVHC=Yes, RoHS=Compliant, Schedule B="8533210045, 8533210045|8533210045|8533210045|8533210045|8533210045|8533210045|8533210045|8533210045|8533210045|8533210045|8533210045|8533210045|8533210045|8533210045|8533210045, 8533210045|8533210045|8533210045|8533210045|8533210045|8533210045|8533210045|8533210045|8533210045|8533210045|8533210045|8533210045|8533210045|8533210045|8533210045|8533210045, 8533210045|8533210045|8533210045|8533210045|8533210045|8533210045|8533210045|8533210045|8533210045|8533210045|8533210045|8533210045|8533210045|8533210045|8533210045|8533210045|8533210045", Stock 1=415000, Supplier 1=Avnet, Supplier Part Number 1=RC0603FR-072K2L, Termination=SMD/SMT, Width=800µm, Working Voltage=75V
R11 R12 R23: library part CMP-01404-1, "RES SMD 4.7K OHM 5% 1/10W 0603", Case Code (Imperial)=0603, Case Code (Metric)=1608, Manufacturer 1=Yageo, Max Operating Temperature=155°C, Max Power Dissipation=100mW, Min Operating Temperature=-55°C, Resistance=4.7kR, Resistance Tolerance=5%, Resistor Type="Thick Film", Temperature Coefficient=100ppm/°C, Voltage Rating=50V, Case/Package=0603, Construction=Rectangular, Depth=0.8mm, Features="Moisture Resistant", Lead Free="Lead Free", Length=1.6mm, Manufacturer Part Number 1=RC0603JR-074K7L, Military Standard=Not, Number of Pins=2, Number of Terminations=2, Packaging="Tape and Reel", Power Rating=100mW, REACH SVHC="No SVHC", Series=RC, Size Code=0603, Termination=SMD/SMT, Tolerance=5%, Voltage Rating (DC)=50V, Width=0.8mm
R13: library part CMP-00299-1_1, "RES SMD 511K OHM 1% 1/16W 0402", Case Code (Imperial)=0402, Case Code (Metric)=1005, Manufacturer=Yageo, Manufacturer Part Number=RC0402FR-07511KL, Max Operating Temperature=155°C, Max Power Dissipation=63mW, Min Operating Temperature=-55°C, Package Quantity=1, Power Rating=62.5mW, Temperature Coefficient=100ppm/°C, Tolerance=1%, Voltage Rating=50V, Case/Package=0402, Composition="Thick Film", Depth=0.5mm, Features="Moisture Resistant", Height=0.016inch, Lead Free="Lead Free", Length=1mm, Manufacturer 1=Yageo, Manufacturer Part Number 1=RC0402FR-07511KL, Military Standard=Not, Number of Terminations=2, Packaging="Tape and Reel", Resistance=511K, Termination=SMD/SMT, Voltage Rating (DC)=50V, Width=0.02inch, Working Voltage=50V
R14: library part CMP-00299-1_1, "RES SMD 49.9R OHM 1% 1/16W 0402", Case Code (Imperial)=0402, Case Code (Metric)=1005, Manufacturer=Yageo, Manufacturer Part Number=RC0402FR-0749R9L, Max Operating Temperature=155°C, Max Power Dissipation=63mW, Min Operating Temperature=-55°C, Package Quantity=1, Power Rating=62.5mW, Temperature Coefficient=100ppm/°C, Tolerance=1%, Voltage Rating=50V, Case/Package=0402, Composition="Thick Film", Depth=0.5mm, Features="Moisture Resistant", Height=0.016inch, Lead Free="Lead Free", Length=1mm, Manufacturer 1=Yageo, Manufacturer Part Number 1=RC0402FR-0749R9L, Military Standard=Not, Number of Terminations=2, Packaging="Tape and Reel", Resistance=49.9R, Termination=SMD/SMT, Voltage Rating (DC)=50V, Width=0.02inch, Working Voltage=50V
R15: library part CMP-00299-1_1, "RES SMD 105K OHM 1% 1/16W 0402", Case Code (Imperial)=0402, Case Code (Metric)=1005, Manufacturer=Yageo, Manufacturer Part Number=RC0402FR-07105KL, Max Operating Temperature=155°C, Max Power Dissipation=63mW, Min Operating Temperature=-55°C, Package Quantity=1, Power Rating=62.5mW, Temperature Coefficient=100ppm/°C, Tolerance=1%, Voltage Rating=50V, Case/Package=0402, Composition="Thick Film", Depth=0.5mm, Features="Moisture Resistant", Height=0.016inch, Lead Free="Lead Free", Length=1mm, Manufacturer 1=Yageo, Manufacturer Part Number 1=RC0402FR-07105KL, Military Standard=Not, Number of Terminations=2, Packaging="Tape and Reel", Resistance=105K, Termination=SMD/SMT, Voltage Rating (DC)=50V, Width=0.02inch, Working Voltage=50V
R16: library part CMP-00299-1_1, "RES SMD 100K OHM 1% 1/16W 0402", Case Code (Imperial)=0402, Case Code (Metric)=1005, Manufacturer=Yageo, Manufacturer Part Number=RC0402FR-07100KL, Max Operating Temperature=155°C, Max Power Dissipation=63mW, Min Operating Temperature=-55°C, Package Quantity=1, Power Rating=62.5mW, Temperature Coefficient=100ppm/°C, Tolerance=1%, Voltage Rating=50V, Case/Package=0402, Composition="Thick Film", Depth=0.5mm, Features="Moisture Resistant", Height=0.016inch, Lead Free="Lead Free", Length=1mm, Manufacturer 1=Yageo, Manufacturer Part Number 1=RC0402FR-07100KL, Military Standard=Not, Number of Terminations=2, Packaging="Tape and Reel", Resistance=100K, Termination=SMD/SMT, Voltage Rating (DC)=50V, Width=0.02inch, Working Voltage=50V
R17: library part CMP-00299-1_1, "RES SMD 13.3K OHM 1% 1/16W 0402", Case Code (Imperial)=0402, Case Code (Metric)=1005, Manufacturer=Yageo, Manufacturer Part Number=RC0402FR-0713K3L, Max Operating Temperature=155°C, Max Power Dissipation=63mW, Min Operating Temperature=-55°C, Package Quantity=1, Power Rating=62.5mW, Temperature Coefficient=100ppm/°C, Tolerance=1%, Voltage Rating=50V, Case/Package=0402, Composition="Thick Film", Depth=0.5mm, Features="Moisture Resistant", Height=0.016inch, Lead Free="Lead Free", Length=1mm, Manufacturer 1=Yageo, Manufacturer Part Number 1=RC0402FR-0713K3L, Military Standard=Not, Number of Terminations=2, Packaging="Tape and Reel", Resistance=13.3K, Termination=SMD/SMT, Voltage Rating (DC)=50V, Width=0.02inch, Working Voltage=50V
R18: library part RC0402FR-0722KL, "RES SMD 510 OHM 1% 1/16W 0402", Case Code (Imperial)=0402, Case Code (Metric)=1005, Manufacturer=Yageo, Max Operating Temperature=155°C, Max Power Dissipation=63mW, Min Operating Temperature=-55°C, Package Quantity=1, Power Rating=62.5mW, Resistance=510, Resistance Tolerance=1%, Resistor Type="Thick Film", Temperature Coefficient=100ppm/°C, Voltage Rating=50V, Case/Package=0402, Category="Chip SMD Resistors", Construction=Rectangular, Depth=0.5mm, Features="Moisture Resistant", Height=0.016inch, Lead Free="Lead Free", Length=0.039inch, Manufacturer Part Number=RT0402FRE07510RL, Military Standard=Not, Number of Terminations=2, Packaging="Tape and Reel", Pricing 1="10000=0.00100, 50000=0.00090, 300000=0.00080, 1000000=0.00080, 3000000=0.00070 (USD)", Reach SVHC Compliant=Yes, RoHS=Yes, RoHS Compliant=Yes, Series=RC, Stock 1=1010000, Supplier 1="Future Electronics", Termination=SMD/SMT, Tolerance=1%, Width=0.02inch, Working Voltage=50V
R19: library part CMP-00034-1, "RES SMD 10K OHM 5% 1/16W 0402", Case Code (Imperial)=0402, Case Code (Metric)=1005, Manufacturer="Vishay Dale", Max Operating Temperature=155°C, Max Power Dissipation=63mW, Min Operating Temperature=-55°C, Package Quantity=1, Resistance=10K, Temperature Coefficient=200ppm/°C, Tolerance=5%, Voltage Rating=50V, Case/Package=0402, Composition="Thick Film", Contact Plating=Tin, Depth=0.5mm, Features="Automotive AEC-Q200", Height=0.016inch, Length=1mm, Manufacturer Part Number 1=CRCW040210K0JNED, Military Standard=Not, Mount="Surface Mount", Number of Terminations=2, Packaging="Tape and Reel", Power Rating=63mW, Radiation Hardening=No, REACH SVHC=Unknown, Termination=SMD/SMT, Weight=2.3E-05oz, Width=0.5mm
R20 R21: library part CMP-01404-1, "RES SMD 2.2K OHM 1% 1/10W 0603", Case Code (Imperial)=0603, Case Code (Metric)=1608, Manufacturer 1=Yageo, Max Operating Temperature=155°C, Max Power Dissipation=100mW, Min Operating Temperature=-55°C, Resistance=2.2K, Resistance Tolerance=5%, Resistor Type="Thick Film", Temperature Coefficient=100ppm/°C, Voltage Rating=50V, Case/Package=0603, Construction=Rectangular, Depth=0.8mm, Features="Moisture Resistant", Lead Free="Lead Free", Length=1.6mm, Manufacturer Part Number 1=RC0603FR-072K2L, Military Standard=Not, Number of Pins=2, Number of Terminations=2, Packaging="Tape and Reel", Power Rating=100mW, REACH SVHC="No SVHC", Series=RC, Size Code=0603, Termination=SMD/SMT, Tolerance=5%, Voltage Rating (DC)=50V, Width=0.8mm
R22: library part CMP-00067-1, "RES SMD 1K OHM 1% 1/10W 0603", Case Code (Imperial)=0603, Case Code (Metric)=1608, Manufacturer=Yageo, Max Operating Temperature=155°C, Min Operating Temperature=-55°C, Power Rating=100mW, Resistance=1kR, Temperature Coefficient=100ppm/°C, Tolerance=1%, Voltage Rating=50V, Case/Package=0603, Composition="Thick Film", Contact Plating=Tin,Matte, Depth=0.8mm, Height=0.45mm, Lead Free="Lead Free", Length=1.6mm, Manufacturer 1=Yageo, Manufacturer Part Number=RC0603FR-071KL, Manufacturer Part Number 1=RC0603FR-071KL, Military Standard=Not, Packaging="Tape and Reel", Radiation Hardening=No, REACH SVHC="No SVHC", Termination=SMD/SMT
R25 R28: library part CMP-01078-4, "RES SMD 10 OHM 5% 1/10W 0603", Case/Package=0603, Manufacturer 1="Rohm Semiconductor", Max Operating Temperature=155°C, Min Operating Temperature=-55°C, Power Rating=100mW, Resistance=10R, Temperature Coefficient=200ppm/°C, Tolerance=5%, Voltage Rating (DC)=50V, Composition="Thick Film", Contact Plating=Tin, Lead Free="Lead Free", Manufacturer Part Number 1=MCR03EZPJ100, Mount="Surface Mount"
U1: "Hall Effect Sensor Angle External Magnet, Not Included Gull Wing", Mounting TypeOperating Temperature="-40°C ~ 150°C", Package / Case=14-TSSOP, Voltage - Supply="3V ~ 3.6V, 4.5V ~ 5.5V", Actuator Type="External Magnet, Not Included", MP=AS5048B-HTSP-500, Output="I2C, PWM", Rotation Angle - Electrical, Mechanical="0° ~ 360°, Continuous", Technology="Hall Effect"
U2: "65-V max, 3-A peak 3-phase motor driver", Package="HTSSOP-28 Texas Instruments", Availability="In Stock", Check_prices=https://www.snapeda.com/parts/DRV8313PWP/Texas+Instruments/view-part/?ref=eda, MF="Texas Instruments", MP=DRV8313PWP, Price=None, Purchase-URL=https://pricing.snapeda.com/search?q=DRV8313PWP&ref=eda, SnapEDA_Link=https://www.snapeda.com/parts/DRV8313PWP/Texas+Instruments/view-part/?ref=snap
U3: "4.5-V to 28-V Input, 3-A Output, EMI Friendly Synchronous Step-Down Converter", Package="SOT-23-THN-6 Texas Instruments", Availability="In Stock", Check_prices=https://www.snapeda.com/parts/TPS54302DDCR/Texas+Instruments/view-part/?ref=eda, MF="Texas Instruments", MP=TPS54302DDCR, Price=None, Purchase-URL=https://pricing.snapeda.com/search?q=TPS54302DDCR&ref=eda, SnapEDA_Link=https://www.snapeda.com/parts/TPS54302DDCR/Texas+Instruments/view-part/?ref=snap
U4: "Adjustable- and fixed-output, 1-A, 16-V, positive-voltage low-dropout (LDO) linear regulator", Package="WSON-6 Texas Instruments", Check_prices=https://www.snapeda.com/parts/TLV76733DRVR/Texas+Instruments/view-part/?ref=eda, MF="Texas Instruments", MP=TLV76733DRVR, SnapEDA_Link=https://www.snapeda.com/parts/TLV76733DRVR/Texas+Instruments/view-part/?ref=snap
U5: "Accelerometer, Gyroscope, 6 Axis Sensor Output", Package=None, Availability=Unavailable, MP=ICM-42688-P, Price=None

## Free pads (board coordinates)
  round 165.35 / inner round 0 / far side round 149.61 hole 86.61: 0(167.13,678.93) 0(1378,1762) 0(1378.33,147.16)
  rect 114.73x114.73 smd rot 165 mask+1.97: 2(1238,1470)
  rect 114.73x114.73 smd rot 145 mask+1.97: 2(1404,1393)

## Via types
v1: diameter 19.68, hole 11.9, Top Layer to Bottom Layer, tented both sides, 408 vias

## Nets (pads, with @x,y where several pads share a name; then routed paths per layer and width w, separated by ;. In a path a pad name is that pad's centre, name@x,y a point inside that pad or via, vN(x,y) a via of type N, cw(c..) or ccw(c..) an arc to the next point about the centre after c; other vN are vias at no path point)
12V: C4.1 C6.1 C7.1 C8.1 C9.1 C12.1 C13.1 J1.1 pad.2@1238,1470 R13.1 U2.4 U2.11 U3.3 | length 375.2
  Top Layer w6: v1(1316,241) 1331,241 1335,245 R13.1@1335,265
  Top Layer w12: v1(1682,1343) v1@1683.5,1341.5 ; C8.1@1797,1341.5 C8.1@1798.5,1340 ; C7.1@1798.5,1210 C6.1@1798.5,1275 C8.1@1798.5,1339.5 ; C7.1@1799,1211 1799,1208.53 1766,1175.53 1766,1134 1811,1089 C4.1@1857.5,1089
  other v1: 1375,436 1402,444 1421,463 1440,481 2003,818 1972,821 1954,841 1989,842 2017,843 1964,1070 1990,1070 2015,1070 1980,1095 2005,1095 1766,1162 1798,1244 1549,1288 1575,1288 1601,1288 1628,1288 1656,1288 1682,1288 1798,1309 1549,1316 1575,1316 1601,1316 1628,1316 1656,1316 1682,1316 1549,1343 1575,1343 1601,1343 1628,1343 1656,1343 1128,1675 1154,1675 1180,1675 1207,1675 1235,1675 1261,1675 1128,1703 1154,1703 1180,1703 1207,1703 1235,1703 1261,1703 1128,1732 1154,1732 1180,1732 1207,1732 1235,1732 1261,1732 1128,1759 1154,1759 1180,1759 1207,1759 1235,1759 1261,1759 1128,1787 1154,1787 1180,1787 1207,1787 1235,1787 1261,1787 1128,1814 1154,1814 1180,1814 1207,1814 1235,1814 1261,1814
+3V3: C2.1 C3.1 R1.1 R2.1 R3.1 R4.1 R5.2 R6.2 R8.2 R9.2 U1.12 | length 3124.7
  Top Layer w10: R5.2@331,848 331,766 331,707 331,628 331,567 686,212 1185,212 1229,256 1229,476 1286,533 1321,533 1509,721 1509,855 1451,913 v1(1305,913) 1239,913 1204,878 1099,878 1059,838 1038,838 v1(1027,849)
  Bottom Layer w6: v1(1305,913) 1331.54,913 1331.54,962.54 R4.1@1332,963
  Bottom Layer w10: U1.12@976.78,980.59 1009.59,980.59 ; R2.1@1061,1090 1043,1090 1028,1075 1028,999 1009.59,980.59 ; R1.1@1066,820 1042,820 1027,835 v1(1027,849) 1027,963.18 1009.59,980.59 ; R1.1@1066.46,820 1066.46,845.46 v1@1087,866
  other v1: 1087,865
+5V: C1.1 C14.1 C15.1 C17.1 C18.1 L1.2 R7.2 R10.2 R14.1 R19.1 R26.2 R29.2 U1.11 U4.6 | length 2852.2
  Top Layer w8: C15.1@125,903.28 125,853 155,823 v1(183,823)
  Layer 1 w15: v1@154,824 183,824 774,233 1266,233 1511,478 v1(1605,478)
  Layer 2 w15: v1(939,929) v1@939,955 ; v1(939,956) 972,989 1415,989 v1(1479,925) 1498.5,905.5 v1@1517,887
  Bottom Layer w10: v1(939,929) 939,955 U1.11@976.78,955
  Bottom Layer w12: R10.2@154,793 154.46,793.46 v1@154.46,824 ; R7.2@154,854 154.46,854.46 R29.2@154.46,915 ; R29.2@154,915 154.46,915.46 R26.2@154.46,975 ; R7.2@154.46,854 v1@154.46,824 ; v1@182,823 155.46,823 v1@154.46,824
  other v1: 1579,478 1632,478 1660,478 156,823 1516,886 1498,905
ETHE1_RX_N: P1.9 P2.9 | length 1295.2
  Top Layer w4: P1.9@481.09,1129.44 470.07,1129.44 464.23,1135.28 393.28,1135.28 377,1119 377,675 634,418 817.31,418 879.31,356 920,356 949,385 949,403.99 P2.9@950.96,405.95
ETHE1_RX_P: P1.7 P2.7 | length 1332.6
  Top Layer w4: P1.7@481.09,1149.12 470.07,1149.12 464.23,1143.28 389.96,1143.28 369,1122.31 369,671.69 630.69,410 814,410 876,348 923.31,348 969.46,394.15 P2.7@969.46,399.22
ETHE1_TX_N: P1.3 P2.3 | length 1640.8
  Top Layer w4: P1.3@481.09,1188.49 470.07,1188.49 464.23,1194.33 418.33,1194.33 360.79,1136.79 360.79,668.21 470,559 793,236 1028,236 1052,260 1052,294.77 1007,339.77 1007,368.21 1005.39,369.83 1005.39,384.69 P2.3@1006.46,385.76
ETHE1_TX_P: P1.1 P2.1 | length 1676.9
  Top Layer w4: P1.1@481.09,1208.18 470.07,1208.18 464.23,1202.33 415.02,1202.33 352.79,1140.11 352.79,664.9 456.34,561.34 464.34,553.34 789.69,228 1031.31,228 1060,256.69 1060,298.09 1015,343.09 1015,360.14 1015.61,360.75 1024.96,370.09 P2.1@1024.95,379.02
ETHE2_RX_N: P1.25 P3.9 | length 738.7
  Top Layer w4: P1.25@481.09,971.96 492.12,971.96 497.96,977.8 518.11,977.8 537,996.69 537,1262.96 568.04,1294 731,1294 844,1407 844,1440.75 845.48,1442.23 P3.9@842.79,1444.92
ETHE2_RX_P: P1.23 P3.7 | length 721.9
  Top Layer w4: P1.23@481.09,991.64 492.12,991.64 497.96,985.8 514.8,985.8 529,1000 529,1266.27 564.73,1302 727.69,1302 732.68,1306.99 764.8,1339.12 836,1410.31 836,1419.35 824.3,1431.05 P3.7@824.3,1438.19
ETHE2_TX_N: P1.19 P3.3 | length 621.4
  Top Layer w4: P1.19@481.09,1031.01 492.12,1031.01 497.96,1036.85 507.34,1036.85 520,1049.52 520,1271 563,1314 713.31,1314 788.37,1389.06 788.37,1423.66 P3.3@787.3,1424.72
ETHE2_TX_P: P1.17 P3.1 | length 605.8
  Top Layer w4: P1.17@481.09,1050.7 492.12,1050.7 497.96,1044.85 504.02,1044.85 512,1052.83 512,1274.31 559.69,1322 710,1322 780.37,1392.37 780.37,1397.49 768.8,1409.06 P3.1@768.8,1417.99